# Allegro board BaseBoard.brd
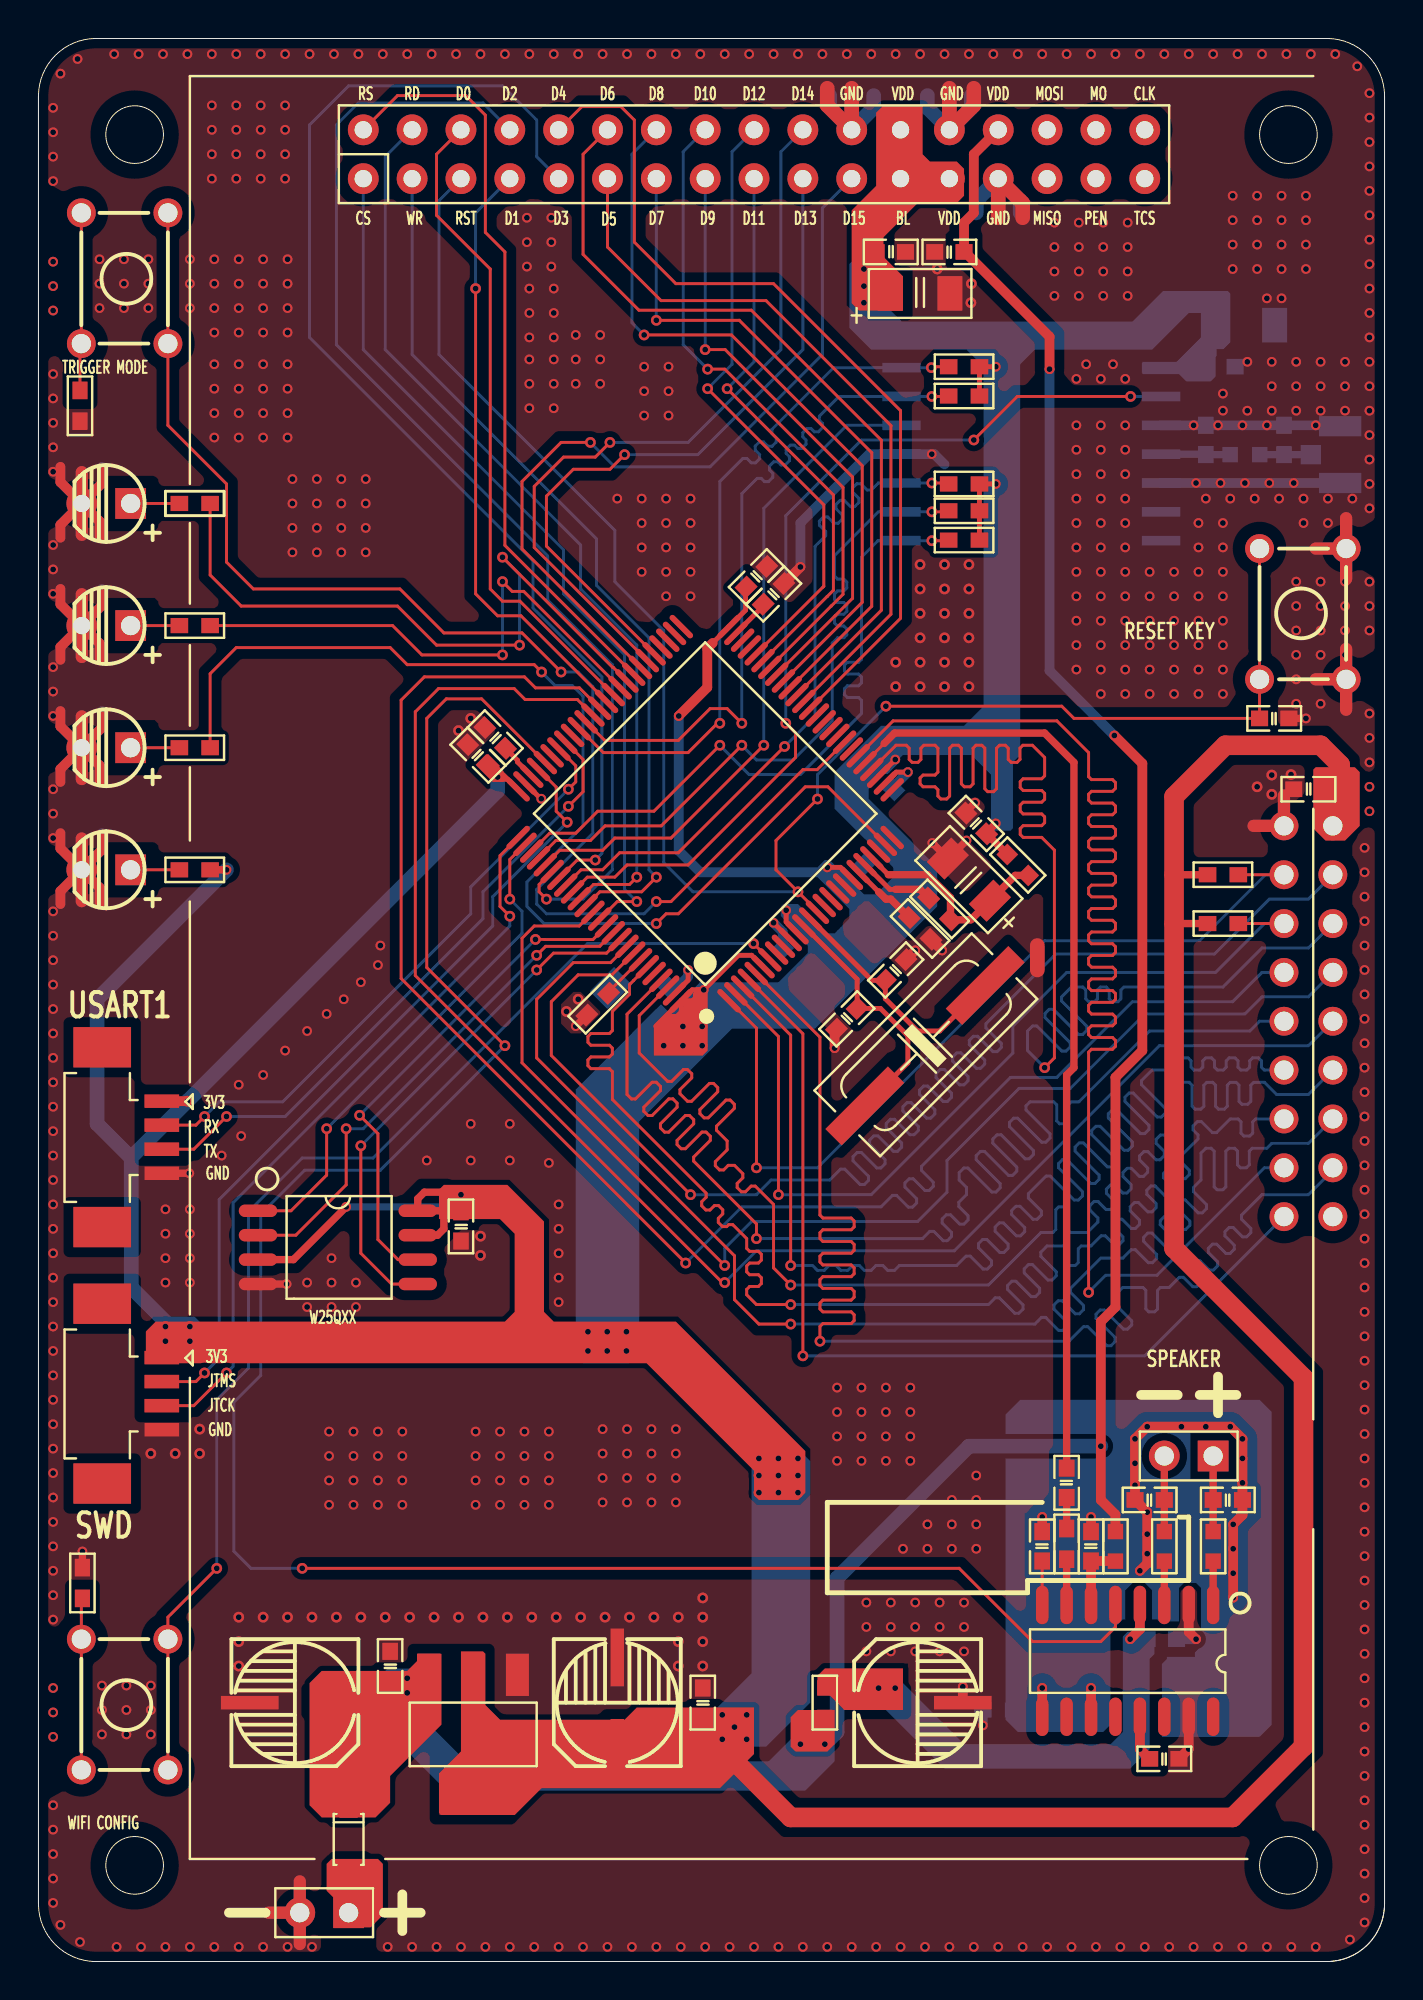
[diagram p0: board, top side]
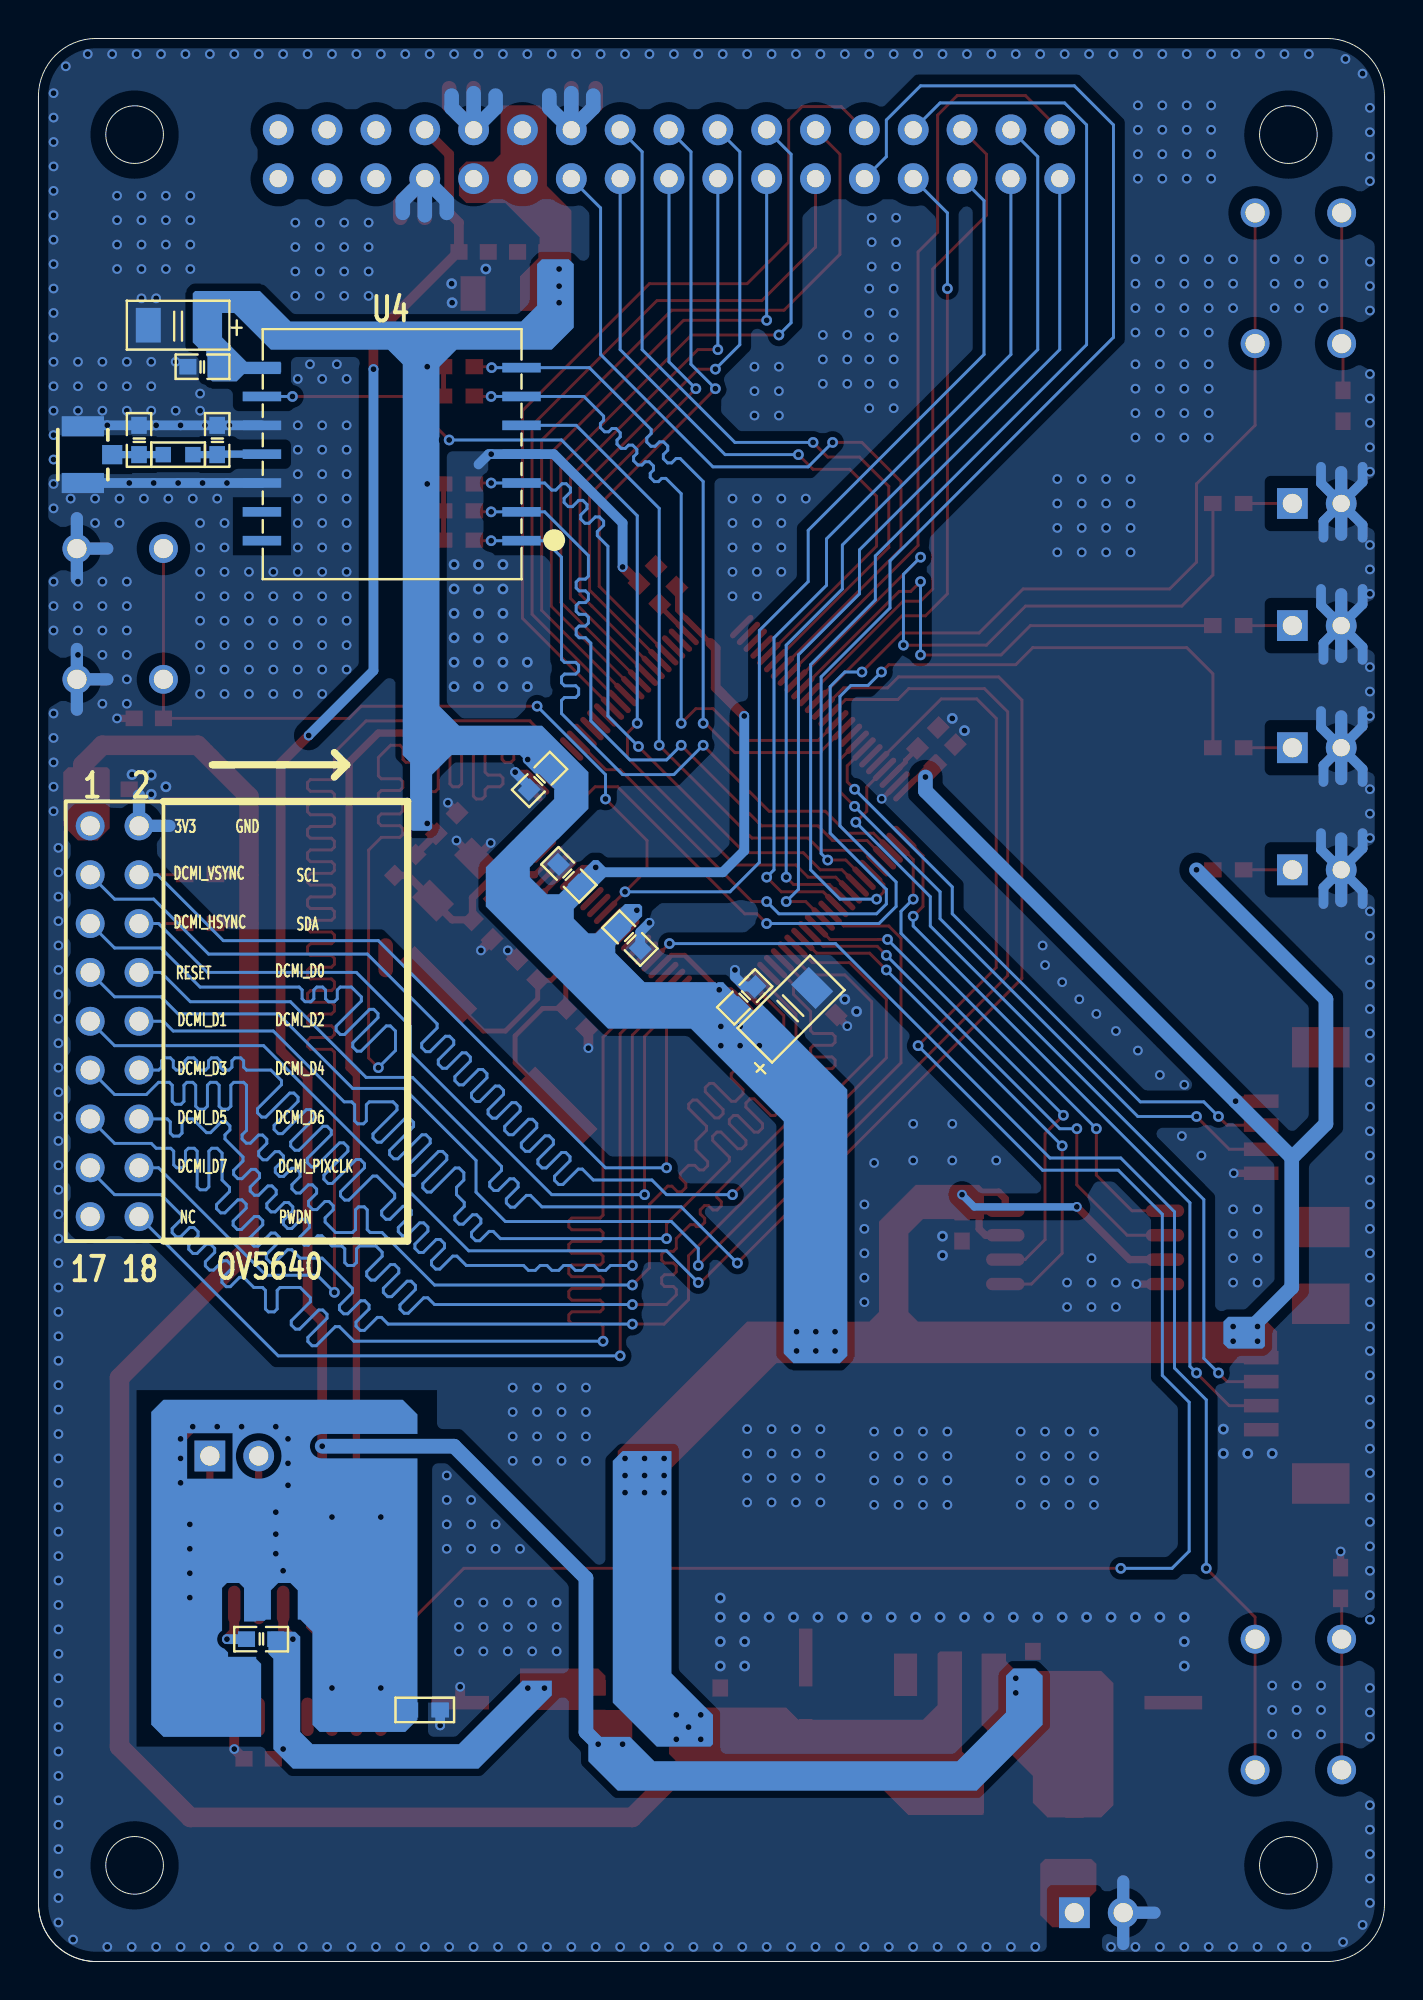
[diagram p1: board, bottom side, seen from below]

Outline 70 x 100 mm; copper layers: TOP, BOTTOM. Coordinates in mm from the lower left corner of the outline.
Outline path: circle c5,95 r1.5 ; circle c5,5 r1.5 ; circle c65,95 r1.5 ; circle c65,5 r1.5 ; 0,97 0,3 ; 0,97 arc(0.88,99.12) 3,100 ; 0,97 0,3 ; 0,3 arc(0.88,0.88) 3,0 ; 3,100 67,100 ; 3,100 67,100 ; 67,100 arc(69.12,99.12) 70,97 ; 3,0 67,0 ; 3,0 67,0 ; 67,0 arc(69.12,0.88) 70,3 ; 67,0 arc(69.12,0.88) 70,3 ; 70,97 70,3 ; 70,97 70,3

## Design rules (mm)
net group PWR: nets AGND AVDD PVDD VCC_3V3 VCC_5V

## Placement (name value [footprint] x y rotation side)
C1  0.1uF/C0603  [C0603]  64.26 64.64 0 top
C2  22pF/C0603  [C0603]  42.04 49.02 225 top
C3  22pF/C0603  [C0603]  44.58 51.56 45 top
C4  2.2uF  [C0603]  38.23 71.12 45 top
C5  2.2uF  [C0603]  23.75 63.63 135 top
C6  0.1uF/C0603  [C0603]  33.27 50.16 315 bottom
C7  0.1uF/C0603  [C0603]  39.24 53.21 45 bottom
C8  0.1uF/C0603  [C0603]  42.42 56.52 225 bottom
C9  0.1uF/C0603  [C0603]  43.94 61.47 135 bottom
C10  0.1uF/C0603  [C0603]  22.86 62.74 315 top
C11  10uF  [TA3216]  30.86 49.53 135 bottom
C12  0.1uF/C0603  [C0603]  48.77 59.18 315 top
C13  10uF  [TA3216]  48.39 56.26 135 top
C14  1uF/C0603  [C0603]  58.55 10.54 0 top
C15  470uF  [C_SMD_6R3X5R3]  45.72 13.46 0 top
C16  1uF/C0603  [C0603]  58.42 16.76 0 bottom
C17  1uF/C0603  [C0603]  54.74 21.59 270 top
C18  1uF/C0603  [C0603]  53.47 24.89 270 top
C19  0.1uF/C0603  [C0603]  52.2 21.59 270 top
C20  1uF/C0603  [C0603]  61.85 24 0 top
C21  1uF/C0603  [C0603]  57.78 24 0 top
C22  0.1uF/C0603  [C0603]  21.97 38.23 90 top
C23  0.1uF/C0603  [C0603]  66.04 60.96 180 top
C24  NC  [C0603]  60.71 79.12 90 bottom
C25  NC  [C0603]  64.77 79.12 90 bottom
C26  0.1uF/C0603  [C0603]  61.47 82.93 180 bottom
C27  10uF  [TA3216]  62.74 85.09 0 bottom
C28  10uF  [TA3216]  45.85 86.74 0 top
C29  0.1uF/C0603  [C0603]  44.32 88.9 180 top
C30  0.1uF/C0603  [C0603]  47.37 88.9 0 top
C31  220uF  [C_SMD_6R3X5R3]  13.34 13.46 180 top
C32  0.1uF  [C0603]  18.29 15.37 90 top
C33  220uF  [C_SMD_6R3X5R3]  30.1 13.46 90 top
C34  0.1uF  [C0603]  34.54 13.46 90 top
C35  0.1uF/C0603  [C0603]  37.34 72.01 225 top
D1  LED  [LED-3MM]  3.52 75.82 180 top
D2  LED  [LED-3MM]  3.52 69.47 180 top
D3  LED  [LED-3MM]  3.52 63.12 180 top
D4  LED  [LED-3MM]  3.52 56.77 180 top
D5  1N5819  [SOD123]  16.13 6.35 90 top
J1  JLINK  [1_25_PWT_4P]  3.68 29.46 270 top
J2  UART1  [1_25_PWT_4P]  3.68 42.8 270 top
J3  OV2640  [CON_2R54_2X9]  67.31 59.05 270 bottom
J4  CON2  [SIP-2]  16.13 2.54 180 top
J5  ANT  [IPX-3X3]  67.69 78.36 180 bottom
L1  10pF  [L0603]  62.74 78.36 0 bottom
LB1  600R  [L0603]  50.93 57.02 315 top
LB2  600R  [L0603]  56.01 21.59 90 top
LB3  600R  [L0603]  40.89 13.46 270 top
LB4  600R  [L0603]  61.09 21.59 270 top
LB5  600R  [L0603]  58.55 21.59 270 top
LCD1  TFT_LCD_3R5  [3_2_LCD]  37.97 93.98 0 top
LS1  SPEAKER/8Ohm/0.5W  [SIP-2]  61.09 26.29 180 top
R1  10k  [R0603]  29.08 49.78 225 top
R2  0R  [R0603]  46.86 54.74 135 top
R3  0R  [R0603]  45.85 53.72 135 top
R4  1k  [R0603]  8.13 75.82 0 top
R5  1k  [R0603]  8.13 69.47 0 top
R6  1k  [R0603]  8.13 63.12 0 top
R7  1k  [R0603]  8.13 56.77 0 top
R8  10k  [R0603]  2.16 80.9 90 top
R9  10k  [R0603]  2.29 19.68 270 top
R10  10k  [R0603]  53.47 21.72 90 top
R11  0R  [R0603]  49.91 13.08 0 bottom
R12  10k  [R0603]  61.59 56.52 0 top
R13  10k  [R0603]  61.59 53.98 0 top
R14  10k  [R0603]  48.13 81.41 180 top
R15  10k  [R0603]  48.13 82.93 180 top
R16  10k  [R0603]  48.13 73.91 180 top
R17  10k  [R0603]  48.13 75.44 180 top
R18  10k  [R0603]  48.13 76.83 180 top
SW1  RESET  [BUTTON_4P_DIP]  63.5 66.67 90 top
SW2  Trigger_Mode  [BUTTON_4P_DIP]  6.73 90.93 270 top
SW3  WIFI_Cfg  [BUTTON_4P_DIP]  6.73 16.76 270 top
U1  STM32F407VET6  [LQFP-100]  34.67 59.69 45 top
U2  PAM8403  [SOIC-16]  61.09 18.54 270 top
U3  W25Q64  [SOP-8-208]  15.57 37.13 0 top
U4  W8782  [W8782_MODULE]  51.69 78.36 270 bottom
U5  AMS1117-3V3  [SOT-223]  22.61 11.81 180 top
X1  8MHz  [CRY_HC_49U_SMD]  46.1 47.62 45 top

## Library data of the parts
C1-C10 C12 C14 C16-C26 C29 C30 C32 C34 C35 = CAP NP
C11 C13 C27 C28 = CAP TAC
C15 C31 C33 = CAP POL
D1-D4 = LED
D5 = Diode
J1 J2 = CON4
J3 = CON18A
J4 = CON2
J5 = CON3
L1 = INDUCTANCE
LB1-LB5 = FB
LCD1 = TFT_LCD_3R5
LS1 = SPEAKER
R1-R18 = RES
SW1-SW3 = SW DPST
U1 = STM32F407VET6
U2 = PAM8403
U3 = W25Q64
U4 = W8782
U5 = AMS1117-3V3
X1 = XTAL

## Footprints (pads in the part's own frame, mm; a bottom-side part is the same pattern mirrored in y, then rotated)
1_25_PWT_4P
  rect 2.101x3 smd: (-4.742,-0.368) (4.608,-0.368)
  rect 0.701x1.801 smd: 1(-1.941,2.731) 2(-0.693,2.731) 3(0.559,2.731) 4(1.808,2.731)
3_2_LCD
  round 1.6 hole 0.899: 1(-21.082,-1.27) 2(-21.082,1.27) 3(-18.542,-1.27) 4(-18.542,1.27) 5(-16.002,-1.27) 6(-16.002,1.27) 7(-13.462,-1.27) 8(-13.462,1.27) 9(-10.922,-1.27) 10(-10.922,1.27) 11(-8.382,-1.27) 12(-8.382,1.27) 13(-5.842,-1.27) 14(-5.842,1.27) 15(-3.302,-1.27) 16(-3.302,1.27) 17(-0.762,-1.27) 18(-0.762,1.27) 19(1.778,-1.27) 20(1.778,1.27) 21(4.318,-1.27) 22(4.318,1.27) 23(6.858,-1.27) 24(6.858,1.27) 25(9.398,-1.27) 26(9.398,1.27) 27(11.938,-1.27) 28(11.938,1.27) 29(14.478,-1.27) 30(14.478,1.27) 31(17.018,-1.27) 32(17.018,1.27) 33(19.558,-1.27) 34(19.558,1.27)
BUTTON_4P_DIP
  round 1.501 hole 1.001: 1(0,0) 2(6.8,0) 3(6.8,-4.501) 4(0,-4.501)
C0603
  rect 0.889x0.813 smd: 1(-0.762,0) 2(0.762,0)
C_SMD_6R3X5R3
  rect 3x0.701 smd: 1(-2.349,0) 2(2.349,0)
CON_2R54_2X9
  round 1.501 hole 1.001: 1(0,0) 2(0,2.54) 3(2.54,0) 4(2.54,2.54) 5(5.08,0) 6(5.08,2.54) 7(7.62,0) 8(7.62,2.54) 9(10.16,0) 10(10.16,2.54) 11(12.7,0) 12(12.7,2.54) 13(15.24,0) 14(15.24,2.54) 15(17.78,0) 16(17.78,2.54) 17(20.32,0) 18(20.32,2.54)
CRY_HC_49U_SMD
  rect 4.6x1.199 smd: 1(-4.427,0) 2(4.427,0)
IPX-3X3
  rect 2.2x1.049 smd: 1(0,1.476) 2(0,-1.476)
  rect 1.049x1.001 smd: 3(1.524,0)
L0603
  rect 0.8x0.8 smd: 1(-0.77,0) 2(0.77,0)
LED-3MM
  rect 1.6x1.6 hole 1.001: 1(-1.27,0)
  round 1.6 hole 0.899: 2(1.27,0)
LQFP-100
  oval 0.3x1.6 smd: 1(-5.999,-7.755) 2(-5.499,-7.755) 3(-5.001,-7.755) 4(-4.501,-7.755) 5(-4,-7.755) 6(-3.5,-7.755) 7(-3,-7.755) 8(-2.499,-7.755) 9(-1.999,-7.755) 10(-1.501,-7.755) 11(-1.001,-7.755) 12(-0.5,-7.755) 13(0,-7.755) 14(0.5,-7.755) 15(1.001,-7.755) 16(1.501,-7.755) 17(1.999,-7.755) 18(2.499,-7.755) 19(3,-7.755) 20(3.5,-7.755) 21(4,-7.755) 22(4.501,-7.755) 23(5.001,-7.755) 24(5.499,-7.755) 25(5.999,-7.755) 51(5.999,7.755) 52(5.499,7.755) 53(5.001,7.755) 54(4.501,7.755) 55(4,7.755) 56(3.5,7.755) 57(3,7.755) 58(2.499,7.755) 59(1.999,7.755) 60(1.501,7.755) 61(1.001,7.755) 62(0.5,7.755) 63(0,7.755) 64(-0.5,7.755) 65(-1.001,7.755) 66(-1.501,7.755) 67(-1.999,7.755) 68(-2.499,7.755) 69(-3,7.755) 70(-3.5,7.755) 71(-4,7.755) 72(-4.501,7.755) 73(-5.001,7.755) 74(-5.499,7.755) 75(-5.999,7.755)
  oval 1.6x0.3 smd: 26(7.755,-5.999) 27(7.755,-5.499) 28(7.755,-5.001) 29(7.755,-4.501) 30(7.755,-4) 31(7.755,-3.5) 32(7.755,-3) 33(7.755,-2.499) 34(7.755,-1.999) 35(7.755,-1.501) 36(7.755,-1.001) 37(7.755,-0.5) 38(7.755,0) 39(7.755,0.5) 40(7.755,1.001) 41(7.755,1.501) 42(7.755,1.999) 43(7.755,2.499) 44(7.755,3) 45(7.755,3.5) 46(7.755,4) 47(7.755,4.501) 48(7.755,5.001) 49(7.755,5.499) 50(7.755,5.999) 76(-7.755,5.999) 77(-7.755,5.499) 78(-7.755,5.001) 79(-7.755,4.501) 80(-7.755,4) 81(-7.755,3.5) 82(-7.755,3) 83(-7.755,2.499) 84(-7.755,1.999) 85(-7.755,1.501) 86(-7.755,1.001) 87(-7.755,0.5) 88(-7.755,0) 89(-7.755,-0.5) 90(-7.755,-1.001) 91(-7.755,-1.501) 92(-7.755,-1.999) 93(-7.755,-2.499) 94(-7.755,-3) 95(-7.755,-3.5) 96(-7.755,-4) 97(-7.755,-4.501) 98(-7.755,-5.001) 99(-7.755,-5.499) 100(-7.755,-5.999)
R0603
  rect 0.914x0.787 smd: 1(-0.8,0) 2(0.8,0)
SIP-2
  rect 1.6x1.6 hole 1.001: 1(0,0)
  round 1.6 hole 1.001: 2(2.54,0)
SOD123
  rect 0.899x0.95 smd: 1(-1.575,0) 2(1.575,0)
SOIC-16
  oval 1.999x0.65 smd: 1(0,0) 2(0,-1.27) 3(0,-2.54) 4(0,-3.81) 5(0,-5.08) 6(0,-6.35) 7(0,-7.62) 8(0,-8.89) 9(5.814,-8.89) 10(5.814,-7.62) 11(5.814,-6.35) 12(5.814,-5.08) 13(5.814,-3.81) 14(5.814,-2.54) 15(5.814,-1.27) 16(5.814,0)
SOP-8-208
  oval 1.999x0.65 smd: 1(-4.153,1.905) 2(-4.153,0.635) 3(-4.153,-0.635) 4(-4.153,-1.905) 5(4.153,-1.905) 6(4.153,-0.635) 7(4.153,0.635) 8(4.153,1.905)
SOT-223
  rect 1.199x2.2 smd: 1(-2.301,-3.099) 2(0,-3.099) 3(2.301,-3.099)
  rect 3.5x2.149 smd: 4(0,3.099)
TA3216
  rect 1.3x1.801 smd: 1(-1.549,0) 2(1.549,0)
W8782_MODULE
  rect 0.5x1.999 smd: 1(4.475,6.81) 2(2.974,6.81) 3(1.476,6.81) 4(-0.025,6.81) 5(-1.524,6.81) 6(-3.025,6.81) 7(-4.524,6.81) 8(-4.524,-6.69) 9(-3.025,-6.69) 10(-1.524,-6.69) 11(-0.025,-6.69) 12(1.476,-6.69) 13(2.974,-6.69) 14(4.475,-6.69)

## Nets
AGND: C17.1 C19.1 C20.2 C21.1 R11.2 U2.9(NC) U2.11(GND)
AVDD: C17.2 LB2.1 U2.6(VDD)
GND: C1.2 C2.2 C3.2 C4.2 C5.2 C6.1 C7.1 C8.1 C9.1 C10.1 C11.2 C12.1 C13.2 C14.2 C15.2 C16.2 C22.1 C23.2 C24.2 C25.2 C26.1 C27.2 C28.2 C29.1 C30.1 C31.2 C32.2 C33.2 C34.2 C35.1 D1.2(K) D2.2(K) D3.2(K) D4.2(K) J1.4 J2.4 J3.2 J4.2 J5.1 J5.2 LCD1.22(GND#22) LCD1.26(GND#26) LCD1.27(GND#27) R1.2 R3.1 R8.1 R9.1 R11.1 SW1.3(NO1) SW1.4(NO2) U1.10(VSS#10) U1.27(VSS#27) U1.74(VSS#74) U1.99(VSS#99) U2.2(PGND#2) U2.15(PGND#15) U3.4(GND) U4.4(GND#4) U4.10(GND#10) U4.12(GND#12) U5.1(GND)
PVDD: C14.1 C15.1 C16.1 LB3.1 U2.4(PVDD#4) U2.13(PVDD#13)
VCC_3V3: C6.2 C7.2 C8.2 C9.2 C10.2 C11.1 C12.2 C22.2 C23.1 C26.2 C27.1 C28.1 C29.2 C33.1 C34.1 C35.2 J1.1 J2.1 J3.1 LB1.1 LCD1.23(BL) LCD1.24(VDD_3V3#24) LCD1.25(VDD_3V3#25) R7.2 R12.1 R13.1 R14.1 R15.1 R16.1 R17.1 R18.1 U1.6(VBAT) U1.11(VDD#11) U1.19(VDD#19) U1.28(VDD#28) U1.50(VDD#50) U1.75(VDD#75) U1.100(VDD#100) U3.3(WP#) U3.7(HOLD) U3.8(VCC) U4.8(3V3) U5.2(OUT0) U5.4(OUT1)
VCC_5V: C30.2 C31.1 C32.1 D5.2 LB2.2 LB3.2 LCD1.28(BL_VDD) U5.3(IN)
BOOT0: R1.1 U1.94(BOOT0/VPP)
DAC2: C18.1 U1.30(PA5/SPI1_SCK/OTG_HS_ULPI_CK/TIM)
DCMI_D0: J3.8 U1.63(PC6/I2S2_MCK/TIM8_CH1/SDIO_D6/U)
DCMI_D1: J3.9 U1.64(PC7/I2S3_MCK/TIM8_CH2/SDIO_D7/U)
DCMI_D2: J3.10 U1.97(PE0/TIM4_ETR/FSMC_NBL0/DCMI_D2/)
DCMI_D3: J3.11 U1.98(PE1/FSMC_NBL1/DCMI_D3/EVENTOUT)
DCMI_D4: J3.12 U1.3(PE4/TRACED1/FSMC_A20/DCMI_D4/EV)
DCMI_D5: J3.13 U1.92(PB6/I2C1_SCL/TIM4_CH1/CAN2_TX/D)
DCMI_D6: J3.14 U1.95(PB8/TIM4_CH3/SDIO_D4/TIM10_CH1/)
DCMI_D7: J3.15 U1.5(PE6/TRACED3/FSMC_A22/TIM9_CH2/D)
DCMI_HSYNC: J3.5 U1.29(PA4/SPI1_NSS/SPI3_NSS/USART2_CK)
DCMI_PIXCLK: J3.16 U1.31(PA6/SPI1_MISO/TIM8_BKIN/TIM13_C)
DCMI_VSYNC: J3.3 U1.93(PB7/I2C1_SDA/FSMC_NL/DCMI_VSYNC)
FLASH_CS: U1.77(PA15(JTDI)/JTDI/SPI3_NSS/I2S3_W) U3.1(CS)
FSMC_D0: LCD1.6(DB1) U1.61(PD14/FSMC_D0/TIM4_CH3/EVENTOUT/)
FSMC_D1: LCD1.7(DB2) U1.62(PD15/FSMC_D1/TIM4_CH4/EVENTOUT)
FSMC_D2: LCD1.8(DB3) U1.81(PD0/FSMC_D2/CAN1_RX/EVENTOUT)
FSMC_D3: LCD1.9(DB4) U1.82(PD1/FSMC_D3/CAN1_TX/EVENTOUT)
FSMC_D4: LCD1.10(DB5) U1.38(PE7/FSMC_D4/TIM1_ETR/EVENTOUT)
FSMC_D5: LCD1.11(DB6) U1.39(PE8/FSMC_D5/TIM1_CH1N/EVENTOUT)
FSMC_D6: LCD1.12(DB7) U1.40(PE9/FSMC_D6/TIM1_CH1/EVENTOUT)
FSMC_D7: LCD1.13(DB8) U1.41(PE10/FSMC_D7/TIM1_CH2N/EVENTOUT)
FSMC_D8: LCD1.14(DB10) U1.42(PE11/FSMC_D8/TIM1_CH2/EVENTOUT)
FSMC_D9: LCD1.15(DB11) U1.43(PE12/FSMC_D9/TIM1_CH3N/EVENTOUT)
FSMC_D10: LCD1.16(DB12) U1.44(PE13/FSMC_D10/TIM1_CH3/EVENTOUT)
FSMC_D11: LCD1.17(DB13) U1.45(PE14/FSMC_D11/TIM1_CH4/EVENTOUT)
FSMC_D12: LCD1.18(DB14) U1.46(PE15/FSMC_D12/TIM1_BKIN/EVENTOU)
FSMC_D13: LCD1.19(DB15) U1.55(PD8/FSMC_D13/USART3_TX/EVENTOUT)
FSMC_D14: LCD1.20(DB16) U1.56(PD9/FSMC_D14/USART3_RX/EVENTOUT)
FSMC_D15: LCD1.21(DB17) U1.57(PD10/FSMC_D15/USART3_CK/EVENTOU)
JTCK: J1.3 U1.76(PA14(JTCK-SWCLK)/JTCK-SWCLK/EVE)
JTMS: J1.2 U1.72(PA13(JTMS-SWDIO)/JTMS-SWDIO/EVE)
KEY1: SW2.1(COMMON1) SW2.2(COMMON2) U1.33(PC4/ETH_RMII_RX_D0/ETH_MII_RX_D)
KEY3: SW3.1(COMMON1) SW3.2(COMMON2) U1.7(PC13/EVENTOUT/RTC_AF1)
LCD_CS: LCD1.1(LCD_CS) U1.88(PD7/USART2_CK/FSMC_NE1/FSMC_NCE)
LCD_RD: LCD1.4(RD) U1.85(PD4/FSMC_NOE/USART2_RTS/EVENTOU)
LCD_RS: LCD1.2(RS) U1.58(PD11/FSMC_CLE/FSMC_A16/USART3_C)
LCD_WR: LCD1.3(WR/CLK) U1.86(PD5/FSMC_NWE/USART2_TX/EVENTOUT)
LED1: R4.2 U1.59(PD12/FSMC_ALE/FSMC_A17/TIM4_CH1)
LED2: R5.2 U1.60(PD13/FSMC_A18/TIM4_CH2/EVENTOUT)
LED3: R6.2 U1.24(PA1/USART2_RTS/UART4_RX/ETH_RMI)
MUTE: U1.71(PA12/USART1_RTS/CAN1_TX/TIM1_ET) U2.5(M\U\T\E\)
OSC_IN: C2.1 U1.12(PH0-OSC_IN(PH0)/EVENTOUT/OSC_IN) X1.1(X1)
OSC_OUT: C3.1 U1.13(PH1-OSC_OUT(PH1)/EVENTOUT/OSC_O) X1.2(X2)
OV_PWDN: J3.18 U1.4(PE5/TRACED2/FSMC_A21/TIM9_CH1/D)
OV_RESET: J3.7 U1.87(PD6/FSMC_NWAIT/USART2_RX/EVENTO)
OV_SCL: J3.4 R12.2 U1.1(PE2/TRACECLK/FSMC_A23/ETH_MII_T)
OV_SDA: J3.6 R13.2 U1.2(PE3/TRACED0/FSMC_A19/EVENTOUT)
RESET: C1.1 LCD1.5(RST) SW1.1(COMMON1) SW1.2(COMMON2) U1.14(NRST)
SDIO_CK: U1.80(PC12/UART5_TX/SDIO_CK/DCMI_D9/S) U4.5(SD_CLK)
SDIO_CMD: R18.2 U1.83(PD2/TIM3_ETR/UART5_RX/SDIO_CMD/) U4.3(SD_CMD)
SDIO_D0: R14.2 U1.65(PC8/TIM8_CH3/SDIO_D0/TIM3_CH3/U) U4.6(SD_D0)
SDIO_D1: R15.2 U1.66(PC9/I2S_CKIN/MCO2/TIM8_CH4/SDIO) U4.7(SD_D1)
SDIO_D2: R16.2 U1.78(PC10/SPI3_SCK/I2S3_CK/UART4_TX/) U4.1(SD_D2)
SDIO_D3: R17.2 U1.79(PC11/UART4_RX/SPI3_MISO/SDIO_D3) U4.2(SD_D3)
SPI1_MISO: U1.90(PB4(NJTRST)/NJTRST/SPI3_MISO/TI) U3.2(SO)
SPI1_MOSI: U1.91(PB5/I2C1_SMBA/CAN2_RX/OTG_HS_UL) U3.5(SI)
SPI1_SCK: U1.89(PB3(JTDO/TRACESWO)/JTDO/TRACESW) U3.6(CLK)
USART1_RX: J2.2 U1.69(PA10/USART1_RX/TIM1_CH3/OTG_FS_)
USART1_TX: J2.3 U1.68(PA9/USART1_TX/TIM1_CH2/I2C3_SMB)
VCAP1: C4.1 U1.49(VCAP_1)
VCAP2: C5.1 U1.73(VCAP_2)
WL_WAKE: U1.84(PD3/FSMC_CLK/USART2_CTS/EVENTOU) U4.9(PDN)
N03479: C13.1 LB1.2 R2.1 U1.22(VDDA)
N04015: R2.2 U1.21(VREF+)
N04111: R3.2 U1.20(VSSA)
N15480: D1.1(A) R4.1
N15556: D2.1(A) R5.1
N15634: D3.1(A) R6.1
N15960: D4.1(A) R7.1
N16253: R8.2 SW2.3(NO1) SW2.4(NO2)
N16267: R9.2 SW3.3(NO1) SW3.4(NO2)
N17141: R10.1 U2.7(INL)
N17187: C18.2 R10.2
N17231: C19.2 U2.8(VREF)
N18659: LB4.2 U2.1(+OUT_L)
N18666: LB5.2 U2.3(-OUT_L)
N18725: C20.1 LB4.1 LS1.1
N18732: C21.2 LB5.1 LS1.2
N25443: C24.1 L1.1 U4.11(ANT_RF)
N25776: C25.1 J5.3 L1.2
N32193: D5.1 J4.1

Pads without a net: J3 17; LCD1 29 30 31 32 33 34; U1 8 9 15 16 17 18 23 25 26 32 34 35 36 37 47 48 51 52 53 54 67 70 96; U2 10 12 14 16; U4 13 14

## Via types
v1: diameter 0.559, hole 0.305, TOP to BOTTOM, 178 vias
v2: diameter 0.508, hole 0.305, TOP to BOTTOM, 703 vias

## Routing (per net, layer and track width the routed paths; a pad name or vN(x,y) marks a point on that pad's centre or on a via; arc(x,y) is an arc through that point)
AGND: length 26.4
  TOP w0.508: U2.11 v2(54.74,14.22) ; v2(62.13,18.92) v2(62.13,20.19) v2(62.13,21.46) v2(62.13,22.73) 62.61,23.22 C20.2 v2(62.61,24.89) v2(62.61,26.16) v2(62.61,27.18) v2(61.98,27.81) v2(60.71,27.81) v2(59.44,27.81) v2(57.66,27.81) v2(57.02,27.18) v2(57.02,25.91) v2(57.02,24.77) 57.02,24 v2(57.66,23.37) v2(57.66,22.23) v2(57.66,21.21) 57.66,20.7 v2(57.28,20.32) ; U2.9 v2(52.2,14.22) ; C19.1 v2(52.2,23.11) ; C17.1 v2(54.74,23.11)
AVDD: length 3.6
  TOP w0.508: LB2.1 56,20.83 C17.2 U2.6
GND: length 227.4
  TOP w0.254: v2(45.21,61.85) 44.61,61.85 44.04,61.29 ; 39.09,53.14 38.23,54.01 v2(38.23,54.01) ; v2(33.78,51.56) 33.78,51.02 U1.99 ; v2(26.15,60.46) 26.12,60.46 25.3,61.29
  TOP w0.381: v2(48.26,58.29) 47.32,57.36 C13.2 v2(46.48,58.17) ; R9.1 v2(2.29,21.32) ; 28.52,49.22 v2(27.94,48.64) ; v2(48.71,60.26) 48.23,59.78 C12.1 ; J2.4 v2(7.84,40.99) ; U3.4 v2(12.9,35.23) ; C1.2 v2(65.91,64.64)
  TOP w0.508: D1.2 1.14,76.93 1.14,77.72 ; D1.2 3.3,76.87 3.3,77.6 ; D1.2 1.14,74.71 1.14,74.04 ; D1.2 3.17,74.9 3.17,74.04 ; 3.17,61.34 3.17,62.2 D3.2 ; C4.2 v2(39.62,72.52) ; D2.2 1.14,70.58 1.14,71.37 ; D2.2 1.14,68.36 1.14,67.69 ; D2.2 3.3,70.52 3.3,71.25 ; D2.2 3.17,68.55 3.17,67.69 ; D3.2 1.14,64.23 1.14,65.02 ; D3.2 1.14,62.01 1.14,61.34 ; D3.2 3.3,64.17 3.3,64.9 ; C14.2 v2(59.82,11.05) U2.15 ; D4.2 1.14,55.66 1.14,54.99 ; D4.2 1.14,57.88 1.14,58.67 ; D4.2 3.17,55.85 3.17,54.99 ; D4.2 3.3,57.82 3.3,58.55 ; v2(60.2,16.76) 59.82,17.14 U2.2 ; C3.2 v2(45.59,52.58) ; C2.2 41.4,48.39 v2(41.4,47.5) ; C15.2 v2(48.07,14.29) ; 46.41,53.15 v2(46.99,52.58)
  TOP w0.635: 2.25,61.49 D3.2 2.25,64.75 ; 2.25,55.14 D4.2 2.25,58.4 ; 2.25,77.45 D1.2 2.25,74.19 ; 64.77,60.63 J3.2 63.19,59.05 ; 13.59,0.91 13.59,2.54 ; 13.59,2.54 13.59,4.17 ; 13.59,2.54 11.96,2.54 ; 66.42,66.67 SW1.4 ; SW1.4 68,65.1 ; SW1.4 68,68.25 ; SW1.3 68,75.05 ; SW1.3 66.42,73.47 ; SW1.3 68,71.89 ; 2.25,71.1 D2.2 2.25,67.84
  TOP w0.762: 49.91,90.68 LCD1.27 51.18,91.44 51.18,90.68 ; 42.29,97.41 LCD1.22 41.02,96.52 41.02,97.41 ; 47.37,97.41 47.37,95.25 48.64,96.52 48.64,97.41 ; 51.94,51.56 51.94,52.83
  BOTTOM w0.508: D3.2 1.14,64.23 1.14,65.02 ; D3.2 3.3,64.17 3.3,65.02 ; D3.2 1.14,62.01 1.14,61.34 ; D3.2 3.17,62.2 3.17,61.34 ; D4.2 3.17,55.85 3.17,54.99 ; D4.2 1.14,55.66 1.14,54.99 ; D4.2 3.3,57.82 3.3,58.67 ; D4.2 1.14,57.88 1.14,58.67 ; C7.1 38.7,53.54 v2(38.23,54.01) ; J5.1 67.64,79.88 v2(66.42,79.88) C25.2 v2(63.88,79.88) v2(62.61,79.88) v2(61.34,79.88) C24.2 v2(60.07,79.88) U4.10 ; 1.14,77.72 1.14,76.93 D1.2 ; D2.2 1.14,70.58 1.14,71.37 ; D2.2 3.17,68.55 3.17,67.69 ; D2.2 3.3,70.52 3.3,71.37 ; D2.2 1.14,68.36 1.14,67.69 ; D1.2 3.3,76.87 3.3,77.72 ; D1.2 1.14,74.71 1.14,74.04 ; D1.2 3.17,74.9 3.17,74.04 ; v2(39.62,72.52) 39.62,74.81 43.2,78.38 U4.4 v2(46.46,78.38) 46.58,78.38 47.12,77.85 ; J5.2 v2(65.28,76.88) v2(64.01,76.88) v2(62.74,76.88) v2(61.47,76.88) v2(60.2,76.88) U4.12 ; R11.1 v2(49.11,12.28) ; v2(33.78,51.56) 33.78,51.21 33.27,50.7 C6.1 ; C9.1 44.48,61.12 v2(45.21,61.85) ; v2(60.2,16.76) C16.2
  BOTTOM w0.635: 2.25,55.14 D4.2 2.25,58.4 ; 66.42,73.47 SW1.3 ; SW1.3 68,71.89 ; SW1.3 68,75.05 ; 2.25,77.45 D1.2 2.25,74.19 ; 68,65.1 SW1.4 ; SW1.4 68,68.25 ; SW1.4 66.42,66.67 ; 2.25,61.49 D3.2 2.25,64.75 ; 11.96,2.54 13.59,2.54 ; 13.59,2.54 13.59,0.91 ; 13.59,2.54 13.59,4.17 ; 2.25,67.84 D2.2 2.25,71.1 ; 63.19,59.05 J3.2 64.77,60.63
  BOTTOM w0.762: 47.37,95.25 47.37,97.16 ; 47.37,95.25 46.23,96.39 46.23,97.03 ; 47.37,95.25 48.51,96.39 48.51,97.03 ; 48.77,90.93 48.77,91.57 LCD1.27 ; 51.05,90.93 51.05,91.57 LCD1.27 ; LCD1.27 49.91,90.81 ; LCD1.22 43.43,96.39 43.43,97.03 ; LCD1.22 42.29,97.16 ; LCD1.22 41.15,96.39 41.15,97.03
  vias: v1(5.84,26.42) v1(7.11,26.42) v1(8.38,27.69) v1(8.38,26.42) v1(10.41,17.91) v1(10.41,16.64) v1(10.41,15.37) v1(11.68,17.91) v1(12.95,17.91) v1(14.22,17.91) v1(15.49,17.91) v1(16.76,17.91) v1(18.03,17.91) v1(19.3,17.91) v1(20.57,17.91) v1(21.84,64.01) v1(21.84,17.91) v1(22.48,64.64) v1(22.99,37.72) v1(22.99,36.72) v1(23.11,17.91) v1(24.38,17.91) v1(25.65,17.91) v1(26.92,17.91) v1(27.46,49.4) v1(28.07,50.04) v1(28.19,17.91) v1(29.46,17.91) v1(30.73,17.91) v1(32,17.91) v1(33.27,17.91) v1(33.27,16.64) v1(33.27,15.37) v1(34.54,18.91) v1(34.54,17.91) v1(34.54,16.64) v1(34.54,15.37) v1(44.58,67.56) v1(44.58,66.29) v1(45.85,72.64) v1(45.85,71.37) v1(45.85,70.1) v1(45.85,68.83) v1(45.85,67.56) v1(45.85,66.29) v1(46.74,88.01) v1(47.12,72.64) v1(47.12,71.37) v1(47.12,70.1) v1(47.12,68.83) v1(47.12,67.56) v1(47.12,66.29) v1(48.39,72.64) v1(48.39,71.37) v1(48.39,70.1) v1(48.39,68.83) v1(48.39,67.56) v1(48.39,66.29) v1(48.51,87.25) v1(48.49,86.26) v1(63.37,61.09) v1(64.14,61.7) v1(64.14,60.7) v1(65.14,61.72) v2(0.76,96.39) v2(0.76,95.12) v2(0.76,93.85) v2(0.76,92.58) v2(0.76,88.39) v2(0.76,87.12) v2(0.76,85.85) v2(0.76,82.55) v2(0.76,81.28) v2(0.76,80.01) v2(0.76,78.74) v2(0.76,77.47) v2(0.76,73.66) v2(0.76,72.39) v2(0.76,71.12) v2(0.76,67.31) v2(0.76,66.04) v2(0.76,64.77) v2(0.76,60.96) v2(0.76,59.69) v2(0.76,58.42) v2(0.76,54.61) v2(0.76,53.34) v2(0.76,52.07) v2(0.76,50.8) v2(0.76,49.53) v2(0.76,48.26) v2(0.76,46.99) v2(0.76,45.72) v2(0.76,44.45) v2(0.76,43.18) v2(0.76,41.91) v2(0.76,40.64) v2(0.76,39.37) v2(0.76,38.1) v2(0.76,36.83) v2(0.76,35.56) v2(0.76,34.29) v2(0.76,33.02) v2(0.76,31.75) v2(0.76,30.48) v2(0.76,29.21) v2(0.76,27.94) v2(0.76,26.67) v2(0.76,25.4) v2(0.76,24.13) v2(0.76,22.86) v2(0.76,21.59) v2(0.76,20.32) v2(0.76,19.05) v2(0.76,17.78) v2(0.76,14.22) v2(0.76,12.95) v2(0.76,11.68) v2(0.76,8.13) v2(0.76,6.86) v2(0.76,5.59) v2(0.76,4.32) v2(0.76,3.05) v2(1.14,98.17) v2(1.14,1.91) v2(2.03,98.93) v2(2.16,1.02) v2(3.17,88.52) v2(3.17,87.25) v2(3.17,85.98) v2(3.3,14.35) v2(3.3,13.08) v2(3.3,11.81) v2(3.94,99.19) v2(4.06,0.76) v2(4.45,88.52) v2(4.45,87.25) v2(4.45,85.98) v2(4.57,14.35) v2(4.57,13.08) v2(4.57,11.81) v2(5.21,99.19) v2(5.33,0.76) v2(5.71,88.52) v2(5.71,87.25) v2(5.71,85.98) v2(5.84,14.35) v2(5.84,13.08) v2(5.84,11.81) v2(6.48,99.19) v2(6.6,39.12) v2(6.6,37.85) v2(6.6,36.58) v2(6.6,35.31) v2(6.6,0.76) v2(7.75,99.19) v2(7.87,88.52) v2(7.87,87.25) v2(7.87,85.98) v2(7.87,39.12) v2(7.87,37.85) v2(7.87,36.58) v2(7.87,35.31) v2(7.87,0.76) v2(9.02,99.19) v2(9.02,96.52) v2(9.02,95.25) v2(9.02,93.98) v2(9.02,92.71) v2(9.14,88.52) v2(9.14,87.25) v2(9.14,85.98) v2(9.14,84.71) v2(9.14,83.06) v2(9.14,81.79) v2(9.14,80.52) v2(9.14,79.25) v2(9.14,0.76) v2(9.53,41.91) v2(10.29,99.19) v2(10.29,96.52) v2(10.29,95.25) v2(10.29,93.98) v2(10.29,92.71) v2(10.41,88.52) v2(10.41,87.25) v2(10.41,85.98) v2(10.41,84.71) v2(10.41,83.06) v2(10.41,81.79) v2(10.41,80.52) v2(10.41,79.25) v2(10.41,45.59) v2(10.41,0.76) v2(10.54,42.93) v2(11.56,99.19) v2(11.56,96.52) v2(11.56,95.25) v2(11.56,93.98) v2(11.56,92.71) v2(11.68,88.52) v2(11.68,87.25) v2(11.68,85.98) v2(11.68,84.71) v2(11.68,83.06) v2(11.68,81.79) v2(11.68,80.52) v2(11.68,79.25) v2(11.68,46.1) v2(11.68,0.76) v2(12.83,99.19) v2(12.83,96.52) v2(12.83,95.25) v2(12.83,93.98) v2(12.83,92.71) v2(12.83,47.37) v2(12.95,88.52) v2(12.95,87.25) v2(12.95,85.98) v2(12.95,84.71) v2(12.95,83.06) v2(12.95,81.79) v2(12.95,80.52) v2(12.95,79.25) v2(12.95,0.76) v2(13.21,77.09) v2(13.21,75.82) v2(13.21,74.55) v2(13.21,73.28) v2(13.97,48.39) v2(13.97,35.31) v2(13.97,34.04) v2(14.1,99.19) v2(14.22,0.76) v2(14.48,77.09) v2(14.48,75.82) v2(14.48,74.55) v2(14.48,73.28) v2(14.99,49.28) v2(15.11,27.56) v2(15.11,26.29) v2(15.11,25.02) v2(15.11,23.75) v2(15.24,36.58) v2(15.24,35.31) v2(15.24,34.04) v2(15.37,99.19) v2(15.75,77.09) v2(15.75,75.82) v2(15.75,74.55) v2(15.75,73.28) v2(15.88,50.04) v2(16.38,27.56) v2(16.38,26.29) v2(16.38,25.02) v2(16.38,23.75) v2(16.51,35.31) v2(16.51,34.04) v2(16.64,99.19) v2(16.76,50.93) v2(17.02,77.09) v2(17.02,75.82) v2(17.02,74.55) v2(17.02,73.28) v2(17.65,51.82) v2(17.65,27.56) v2(17.65,26.29) v2(17.65,25.02) v2(17.65,23.75) v2(17.78,52.83) v2(17.91,99.19) v2(18.16,0.76) v2(18.92,27.56) v2(18.92,26.29) v2(18.92,25.02) v2(18.92,23.75) v2(19.18,99.19) v2(19.43,0.76) v2(20.19,41.66) v2(20.45,99.19) v2(20.7,0.76) v2(21.72,99.19) v2(21.97,0.76) v2(22.48,43.56) v2(22.48,41.66) v2(22.73,27.56) v2(22.73,26.29) v2(22.73,25.02) v2(22.73,23.75) v2(22.99,99.19) v2(23.24,0.76) v2(24,27.56) v2(24,26.29) v2(24,25.02) v2(24,23.75) v2(24.26,99.19) v2(24.51,43.56) v2(24.51,41.66) v2(24.51,0.76) v2(25.27,27.56) v2(25.27,26.29) v2(25.27,25.02) v2(25.27,23.75) v2(25.4,90.68) v2(25.4,89.41) v2(25.4,88.14) v2(25.53,99.19) v2(25.53,87) v2(25.53,85.72) v2(25.53,84.45) v2(25.53,83.31) v2(25.53,82.04) v2(25.53,80.77) v2(25.78,0.76) v2(26.54,41.53) v2(26.54,27.56) v2(26.54,26.29) v2(26.54,25.02) v2(26.54,23.75) v2(26.67,90.68) v2(26.67,89.41) v2(26.67,88.14) v2(26.8,99.19) v2(26.8,87) v2(26.8,85.72) v2(26.8,84.45) v2(26.8,83.31) v2(26.8,82.04) v2(26.8,80.77) v2(27.05,39.37) v2(27.05,38.1) v2(27.05,36.83) v2(27.05,35.56) v2(27.05,34.29) v2(27.05,0.76) v2(27.94,84.58) v2(27.94,83.31) v2(27.94,82.04) v2(28.07,99.19) v2(28.32,0.76) v2(29.21,84.58) v2(29.21,83.31) v2(29.21,82.04) v2(29.34,99.19) v2(29.34,27.69) v2(29.34,26.42) v2(29.34,25.15) v2(29.34,23.88) v2(29.59,0.76) v2(30.1,76.07) v2(30.61,99.19) v2(30.61,27.69) v2(30.61,26.42) v2(30.61,25.15) v2(30.61,23.88) v2(30.86,0.76) v2(31.37,76.07) v2(31.37,74.8) v2(31.37,73.53) v2(31.37,72.26) v2(31.5,82.93) v2(31.5,81.66) v2(31.5,80.39) v2(31.88,99.19) v2(31.88,27.69) v2(31.88,26.42) v2(31.88,25.15) v2(31.88,23.88) v2(32.13,0.76) v2(32.64,76.07) v2(32.64,74.8) v2(32.64,73.53) v2(32.64,72.26) v2(32.64,70.99) v2(32.77,82.93) v2(32.77,81.66) v2(32.77,80.39) v2(33.15,99.19) v2(33.15,27.69) v2(33.15,26.42) v2(33.15,25.15) v2(33.15,23.88) v2(33.4,0.76) v2(33.91,76.07) v2(33.91,74.8) v2(33.91,73.53) v2(33.91,72.26) v2(33.91,70.99) v2(34.42,99.19) v2(34.67,0.76) v2(35.69,99.19) v2(35.94,0.76) v2(36.96,99.19) v2(37.21,0.76) v2(38.23,99.19) v2(38.48,0.76) v2(39.5,99.19) v2(39.75,0.76) v2(40.77,99.19) v2(41.02,0.76) v2(41.53,29.84) v2(41.53,28.57) v2(41.53,27.3) v2(41.53,26.04) v2(42.04,99.19) v2(42.29,0.76) v2(42.8,29.84) v2(42.8,28.57) v2(42.8,27.3) v2(42.8,26.04) v2(43.05,18.67) v2(43.05,17.4) v2(43.05,16.13) v2(43.31,99.19) v2(43.56,0.76) v2(44.07,29.84) v2(44.07,28.57) v2(44.07,27.3) v2(44.07,26.04) v2(44.32,18.67) v2(44.32,17.4) v2(44.32,16.13) v2(44.58,99.19) v2(44.83,0.76) v2(44.96,21.46) v2(45.34,29.84) v2(45.34,28.57) v2(45.34,27.3) v2(45.34,26.04) v2(45.59,18.67) v2(45.59,17.4) v2(45.59,16.13) v2(45.85,99.19) v2(46.1,0.76) v2(46.23,22.73) v2(46.23,21.46) v2(46.86,18.67) v2(46.86,17.4) v2(46.86,16.13) v2(47.12,99.19) v2(47.37,0.76) v2(47.5,24) v2(47.5,22.73) v2(47.5,21.46) v2(48.13,18.67) v2(48.13,17.4) v2(48.13,16.13) v2(48.39,99.19) v2(48.64,0.76) v2(48.77,25.27) v2(48.77,24) v2(48.77,22.73) v2(48.77,21.46) v2(49.66,99.19) v2(49.91,0.76) v2(50.93,99.19) v2(51.18,0.76) v2(52.2,99.19) v2(52.45,0.76) v2(52.83,90.42) v2(52.83,89.15) v2(52.83,87.88) v2(52.83,86.61) v2(53.47,99.19) v2(53.72,0.76) v2(53.98,82.3) v2(53.98,79.88) v2(53.98,78.61) v2(53.98,77.34) v2(53.98,76.07) v2(53.98,74.8) v2(53.98,73.53) v2(53.98,72.26) v2(53.98,70.99) v2(53.98,69.72) v2(53.98,68.45) v2(53.98,67.18) v2(54.1,90.42) v2(54.1,89.15) v2(54.1,87.88) v2(54.1,86.61) v2(54.48,83.06) v2(54.74,99.19) v2(54.99,0.76) v2(55.24,82.3) v2(55.24,79.88) v2(55.24,78.61) v2(55.24,77.34) v2(55.24,76.07) v2(55.24,74.8) v2(55.24,73.53) v2(55.24,72.26) v2(55.24,70.99) v2(55.24,69.72) v2(55.24,68.45) v2(55.24,67.18) v2(55.24,65.91) v2(55.37,90.42) v2(55.37,89.15) v2(55.37,87.88) v2(55.37,86.61) v2(55.88,83.06) v2(56.01,99.19) v2(56.26,0.76) v2(56.52,82.3) v2(56.52,79.88) v2(56.52,78.61) v2(56.52,77.34) v2(56.52,76.07) v2(56.52,74.8) v2(56.52,73.53) v2(56.52,72.26) v2(56.52,70.99) v2(56.52,69.72) v2(56.52,68.45) v2(56.52,67.18) v2(56.52,65.91) v2(56.64,90.42) v2(56.64,89.15) v2(56.64,87.88) v2(56.64,86.61) v2(57.28,99.19) v2(57.53,0.76) v2(57.78,72.26) v2(57.78,70.99) v2(57.78,69.72) v2(57.78,68.45) v2(57.78,67.18) v2(57.78,65.91) v2(58.55,99.19) v2(58.8,0.76) v2(59.05,72.26) v2(59.05,70.99) v2(59.05,69.72) v2(59.05,68.45) v2(59.05,67.18) v2(59.05,65.91) v2(59.82,99.19) v2(60.07,0.76) v2(60.33,74.8) v2(60.33,73.53) v2(60.33,72.26) v2(60.33,70.99) v2(60.33,69.72) v2(60.33,68.45) v2(60.33,67.18) v2(60.33,65.91) v2(60.71,76.07) v2(61.09,99.19) v2(61.34,0.76) v2(61.59,81.53) v2(61.59,80.64) v2(61.59,74.8) v2(61.59,73.53) v2(61.59,72.26) v2(61.59,70.99) v2(61.59,69.72) v2(61.59,68.45) v2(61.59,67.18) v2(61.59,65.91) v2(61.98,76.07) v2(62.1,91.82) v2(62.1,90.55) v2(62.1,89.28) v2(62.1,88.01) v2(62.36,99.19) v2(62.61,0.76) v2(62.87,83.19) v2(62.87,80.64) v2(63.25,76.07) v2(63.37,91.82) v2(63.37,90.55) v2(63.37,89.28) v2(63.37,88.01) v2(63.63,99.19) v2(63.88,86.49) v2(63.88,0.76) v2(64.14,83.19) v2(64.14,81.92) v2(64.14,80.64) v2(64.52,76.07) v2(64.64,91.82) v2(64.64,90.55) v2(64.64,89.28) v2(64.64,88.01) v2(64.64,86.49) v2(64.9,99.19) v2(65.15,0.76) v2(65.41,83.19) v2(65.41,81.92) v2(65.41,80.64) v2(65.41,71.75) v2(65.41,70.48) v2(65.41,69.22) v2(65.41,67.94) v2(65.41,66.67) v2(65.41,65.41) v2(65.79,76.07) v2(65.79,74.8) v2(65.91,91.82) v2(65.91,90.55) v2(65.91,89.28) v2(65.91,88.01) v2(66.17,99.19) v2(66.42,0.76) v2(66.67,83.19) v2(66.67,81.92) v2(66.67,80.64) v2(66.67,71.75) v2(66.67,70.48) v2(66.67,69.22) v2(66.67,67.94) v2(66.67,65.41) v2(67.06,76.07) v2(67.06,74.8) v2(67.44,99.19) v2(67.94,83.19) v2(67.94,81.92) v2(67.94,80.64) v2(67.94,71.75) v2(67.94,70.48) v2(67.94,69.22) v2(67.94,67.94) v2(68.2,1.14) v2(68.33,76.07) v2(68.58,98.55) v2(68.96,57.91) v2(68.96,56.64) v2(68.96,55.37) v2(68.96,54.1) v2(68.96,52.83) v2(68.96,51.56) v2(68.96,50.29) v2(68.96,49.02) v2(68.96,47.75) v2(68.96,46.48) v2(68.96,45.21) v2(68.96,43.94) v2(68.96,42.67) v2(68.96,41.4) v2(68.96,40.13) v2(68.96,38.86) v2(68.96,37.59) v2(68.96,36.32) v2(68.96,35.05) v2(68.96,33.78) v2(68.96,32.51) v2(68.96,31.24) v2(68.96,29.97) v2(68.96,28.7) v2(68.96,27.43) v2(68.96,26.16) v2(68.96,24.89) v2(68.96,23.62) v2(68.96,22.35) v2(68.96,21.08) v2(68.96,19.81) v2(68.96,18.54) v2(68.96,17.27) v2(68.96,16) v2(68.96,14.73) v2(68.96,13.46) v2(68.96,12.19) v2(68.96,10.92) v2(68.96,9.65) v2(68.96,8.38) v2(68.96,7.11) v2(68.96,5.84) v2(68.96,4.57) v2(68.96,3.3) v2(68.96,2.03) v2(69.22,97.16) v2(69.22,95.89) v2(69.22,94.61) v2(69.22,93.34) v2(69.22,92.08) v2(69.22,90.81) v2(69.22,89.53) v2(69.22,88.27) v2(69.22,87) v2(69.22,85.72) v2(69.22,84.45) v2(69.22,83.19) v2(69.22,81.92) v2(69.22,80.64) v2(69.22,79.38) v2(69.22,78.11) v2(69.22,76.83) v2(69.22,75.56) v2(69.22,71.75) v2(69.22,70.48) v2(69.22,69.22) v2(69.22,64.9) v2(69.22,63.63) v2(69.22,62.36) v2(69.22,61.09) v2(69.22,59.82)
PVDD: length 4.4
  TOP w0.508: C14.1 v2(57.28,11.05) U2.13 ; v2(56.77,16.76) 57.28,17.27 U2.4
  vias: v1(43.69,14.22) v1(44.55,14.22)
VCC_3V3: length 225.3
  TOP w0.254: 33.43,49.96 33.98,49.96 ; 33.43,49.96 33.43,49.43 ; 33.43,49.96 32.11,48.64 ; 33.43,49.96 33.99,50.53 v2(34.6,50.53) 36.39,52.32 37.09,52.32 37.68,51.73 ; 33.43,49.96 33.71,49.68 ; 43.69,61.64 v2(44.56,62.5) ; v2(49.78,82.93) R15.1 R14.1 ; U1.19 41.71,56.9 v2(41.02,56.9) ; 35.06,68.57 36.77,70.27 36.77,71.44 C35.2 ; 24.16,61.72 24.4,61.48 ; 24.4,61.48 U1.75 ; 24.4,61.48 23.99,61.48 v2(23.88,61.59) ; R16.1 R17.1 R18.1 v2(49.78,76.83) ; U1.11 38.88,54.06 v2(38.88,54.67)
  TOP w0.381: 50.38,57.57 C12.2 49.31,58.7 v2(49.78,59.18) ; 59.05,56.52 R12.1 ; U3.7 20.75,37.77 21.08,38.1 21.08,39.12 21.01,39.04 U3.8 19.72,39.66 20.07,40.01 21.21,40.01 ; v2(16,39.24) 13.26,36.5 U3.3 ; R7.2 v2(9.78,56.77) ; 59.05,53.98 R13.1
  TOP w0.508: 35.06,68.57 34.78,68.28 34.78,66.25 v2(33.3,64.77) ; v1(7.75,44.74) J2.1
  TOP w1.016: 36.45,10.16 39.12,7.49 62.1,7.49 65.79,11.18 65.79,30.35 59.05,37.08 59.05,60.58 61.72,63.25 66.67,63.25 67.69,62.23 67.69,61.72
  BOTTOM w0.381: v2(16,39.24) 21.34,39.24 v2(21.97,39.88)
  BOTTOM w0.508: C9.2 44.06,62.01 v2(44.56,62.5) ; v2(38.88,54.67) 39.78,53.77 C7.2 ; 40.64,56.64 34.42,56.64 33.3,57.76 v2(33.3,64.77) ; C8.2 41.88,56.04 v2(41.02,56.9) ; v2(34.6,50.53) 33.81,49.74 C6.2
  BOTTOM w0.762: 4.83,41.78 3.05,43.56 3.05,50.04 v2(9.78,56.77) ; 4.83,41.78 4.83,41.82 v1(7.75,44.74) 23.88,60.87 v2(23.88,61.59) ; 4.83,41.78 4.83,35.05 6.67,33.21
  vias: v1(6.6,33.02) v1(6.6,32.26) v1(7.87,33.02) v1(7.87,32.26) v1(28.57,32.75) v1(28.57,31.75) v1(29.58,32.75) v1(29.58,31.75) v1(30.58,32.75) v1(30.58,31.75) v1(32.51,47.62) v1(33.51,48.63) v1(33.51,47.62) v1(34.51,48.63) v1(34.51,47.62) v1(35.56,12.83) v1(35.56,11.56) v1(36.2,12.19) v1(36.83,12.83) v1(36.83,11.56) v1(37.47,26.16) v1(37.47,25.27) v1(37.47,24.38) v1(38.48,26.16) v1(38.48,25.27) v1(38.48,24.38) v1(39.5,26.16) v1(39.5,25.27) v1(39.5,24.38) v1(42.93,88.01) v1(42.93,87.12) v1(42.93,86.26)
VCC_5V: length 104.2
  TOP w0.508: v2(55.95,63.75) 57.4,62.3 57.4,47.37 56.01,45.97 56.01,34.04 55.24,33.27 v2(55.24,26.8) 55.24,24 56.01,23.24 LB2.2 ; LCD1.28 48.64,93.98 48.64,90.93 48.13,90.42 C30.2 48.17,88.9 52.58,84.49 v2(52.58,82.8)
  BOTTOM w0.508: v2(55.95,63.75) 52.58,67.12 v2(52.58,82.8)
  BOTTOM w0.762: v1(40.89,11.3) 41.53,11.94 41.53,19.94 48.39,26.8 v2(55.24,26.8)
  vias: v1(19.18,14.73) v1(19.18,13.97) v1(39.62,11.3)
BOOT0: length 2.4
  TOP w0.152: 29.65,50.35 29.65,50.43 U1.94
DAC2: length 49
  TOP w0.152: 42.98,62.34 43.98,63.34
  TOP w0.381: 43.98,63.34 44.52,63.88 52.32,63.88 53.85,62.36 53.85,46.48 53.47,46.1 C18.1
DCMI_D0: length 88.2
  TOP w0.152: v1(33.66,36.32) 18.86,51.12 18.86,65.6 20.07,66.8 25.27,66.8 25.84,66.23 28.13,66.23 U1.63
  BOTTOM w0.152: v1(33.66,36.32) 36.58,39.24 43.81,39.24 44.41,39.84 44.63,39.84 45.24,39.23 45.45,39.23 45.67,39.45 45.67,39.66 45.06,40.27 45.06,40.49 45.28,40.7 45.49,40.7 46.1,40.09 46.31,40.09 46.53,40.31 46.53,40.52 45.92,41.14 45.92,41.35 50.55,45.97 52.96,45.97 56.9,49.91 62.1,49.91 63.63,51.44 J3.8
DCMI_D1: length 84
  TOP w0.152: v1(35.69,35.31) 35.56,35.31 19.6,51.27 19.6,64.99 20.8,66.19 24.74,66.19 25.31,65.62 28.03,65.62 28.83,64.82
  BOTTOM w0.152: 67.31,48.9 66.04,47.62 58.29,47.62 47.62,36.96 37.34,36.96 v1(35.69,35.31)
DCMI_D2: length 81.4
  TOP w0.152: U1.97 30.61,49.26 30.61,45.09 30.84,44.86 31.05,44.86 31.92,45.72 32.13,45.72 32.35,45.5 32.35,45.29 31.48,44.42 31.48,44.21 31.7,43.99 31.91,43.99 32.78,44.86 32.99,44.86 33.21,44.64 33.21,44.43 32.34,43.56 32.34,43.35 32.56,43.13 32.78,43.13 33.64,44 33.86,44 34.07,43.78 34.07,43.56 33.21,42.7 33.21,42.48 33.43,42.27 33.64,42.27 34.51,43.13 34.72,43.13 34.94,42.91 34.94,42.7 34.07,41.83 34.07,41.62 37.34,38.35 v1(37.34,37.59)
  BOTTOM w0.152: v1(37.34,37.59) 45.97,37.59 46.35,37.97 46.56,37.97 47.05,37.48 47.26,37.48 47.48,37.7 47.48,37.91 47,38.4 47,38.61 47.21,38.83 47.43,38.83 47.91,38.35 48.13,38.35 48.34,38.56 48.34,38.78 47.86,39.26 47.86,39.48 48.26,39.88 48.26,40.26 47.88,40.64 47.88,41.02 48.12,41.26 48.33,41.26 49.58,40.02 49.79,40.02 50.01,40.23 50.01,40.45 48.77,41.69 48.77,41.91 48.98,42.13 49.2,42.13 50.44,40.88 50.66,40.88 50.88,41.1 50.88,41.31 49.63,42.56 49.63,42.77 49.85,42.99 50.06,42.99 51.31,41.74 51.52,41.74 51.74,41.96 51.74,42.17 50.49,43.42 50.49,43.63 50.71,43.85 50.92,43.85 52.17,42.61 52.38,42.61 52.6,42.82 52.6,43.04 51.36,44.28 51.36,44.5 51.56,44.7 52.8,44.7 52.95,44.55 52.95,43.71 53.1,43.56 53.41,43.56 53.56,43.71 53.56,44.55 53.71,44.7 54.1,44.7 57.78,48.39 62.99,48.39 63.5,48.9 64.77,48.9
DCMI_D3: length 81.1
  TOP w0.152: 32.72,50.67 31.24,49.19 31.24,47.24 32.72,45.77 32.93,45.77 33.54,46.38 33.75,46.38 33.97,46.16 33.97,45.95 33.36,45.34 33.36,45.13 33.75,44.73 33.96,44.73 34.89,45.66 35.11,45.66 35.32,45.44 35.32,45.23 34.4,44.3 34.4,44.09 34.62,43.87 34.83,43.87 35.76,44.8 35.97,44.8 36.19,44.58 36.19,44.37 35.26,43.44 35.26,43.23 35.81,42.67 35.81,42.21 35.2,41.6 35.2,41.38 35.42,41.16 35.63,41.16 35.87,41.4 36.2,41.4 36.63,40.97 36.63,40.75 36.33,40.46 36.33,40.25 36.55,40.03 36.77,40.03 37.06,40.32 37.27,40.32 38.23,39.37 38.23,36.07 v1(39.12,35.18)
  BOTTOM w0.152: v1(39.12,35.18) 49.4,35.18 52.13,37.91 52.75,37.91 52.9,38.06 52.9,39.09 53.06,39.24 53.36,39.24 53.51,39.09 53.51,38.06 53.67,37.91 54.55,37.91 55.09,38.46 55.09,38.67 54.67,39.09 54.67,39.3 54.89,39.52 55.1,39.52 55.52,39.1 55.74,39.1 55.96,39.32 55.96,39.53 55.53,39.95 55.53,40.17 55.75,40.39 55.97,40.39 56.39,39.96 56.6,39.96 56.82,40.18 56.82,40.4 56.4,40.82 56.4,41.03 56.62,41.25 56.83,41.25 57.25,40.83 57.46,40.83 57.68,41.05 57.68,41.26 57.26,41.68 57.26,41.89 57.48,42.11 57.69,42.11 58.12,41.69 58.33,41.69 58.55,41.91 58.55,42.12 58.13,42.55 58.13,42.76 58.34,42.98 58.56,42.98 58.98,42.56 59.19,42.56 59.41,42.77 59.41,42.99 59.18,43.22 59.18,45.57 59.33,45.72 59.84,45.72 59.99,45.57 59.99,44.48 60.15,44.32 60.45,44.32 60.6,44.48 60.6,45.57 60.76,45.72 61.06,45.72 61.21,45.57 61.21,44.48 61.37,44.32 61.67,44.32 61.82,44.48 61.82,45.57 61.98,45.72 62.28,45.72 62.43,45.57 62.43,44.73 62.59,44.58 62.89,44.58 63.04,44.73 63.04,45.57 63.2,45.72 63.75,45.72 64.39,45.09 66.04,45.09 J3.11
DCMI_D4: length 81.2
  TOP w0.152: 36.62,50.67 39.12,48.17 v1(39.12,36.2)
  BOTTOM w0.152: J3.12 63.75,46.35 63.6,46.51 63.6,46.84 63.44,46.99 63.14,46.99 62.99,46.84 62.99,46.51 62.83,46.35 62.53,46.35 62.38,46.51 62.38,46.84 62.22,46.99 61.92,46.99 61.77,46.84 61.77,46.51 61.62,46.35 61.31,46.35 61.16,46.51 61.16,46.84 61.01,46.99 60.7,46.99 60.55,46.84 60.55,46.51 60.4,46.35 60.09,46.35 59.94,46.51 59.94,46.84 59.79,46.99 59.48,46.99 59.33,46.84 59.33,46.51 59.18,46.35 57.91,46.35 57.36,45.81 57.36,45.59 58.61,44.35 58.61,44.13 58.39,43.91 58.18,43.91 56.93,45.16 56.72,45.16 56.5,44.94 56.5,44.73 57.75,43.48 57.75,43.27 57.53,43.05 57.32,43.05 56.07,44.3 55.85,44.3 55.64,44.08 55.64,43.87 56.88,42.62 56.88,42.41 56.66,42.19 56.45,42.19 55.2,43.43 54.99,43.43 54.77,43.22 54.77,43 56.02,41.76 56.02,41.54 55.8,41.32 55.59,41.32 54.34,42.57 54.13,42.57 53.91,42.35 53.91,42.14 55.16,40.89 55.16,40.68 54.94,40.46 54.72,40.46 53.48,41.71 53.26,41.71 53.05,41.49 53.05,41.27 54.29,40.03 54.29,39.81 54.07,39.6 53.86,39.6 52.61,40.84 52.4,40.84 51.48,39.92 51.48,39.71 52.15,39.03 52.15,38.82 51.93,38.6 51.72,38.6 51.04,39.27 50.83,39.27 50.61,39.06 50.61,38.84 51.29,38.17 51.29,37.95 51.07,37.73 50.86,37.73 50.18,38.41 49.97,38.41 49.75,38.19 49.75,37.98 50.42,37.3 50.42,37.09 50.21,36.87 49.99,36.87 49.32,37.55 49.1,37.55 48.88,37.33 48.88,37.11 49.56,36.44 49.56,36.23 49.34,36.01 49.13,36.01 48.45,36.68 48.24,36.68 47.75,36.2 44.77,36.2 44.52,35.94 44.16,35.94 43.91,36.2 43.55,36.2 43.3,35.94 42.94,35.94 42.69,36.2 42.33,36.2 42.08,35.94 41.72,35.94 41.47,36.2 41.11,36.2 40.86,35.94 40.51,35.94 40.25,36.2 v1(39.12,36.2)
DCMI_D5: length 81.2
  TOP w0.152: v1(39.12,33.15) 37.47,33.15 36.2,34.42 36.2,36.7 25.91,46.99 25.91,50.04 27.81,51.94 29.75,51.94 U1.92
  BOTTOM w0.152: v1(39.12,33.15) 51.82,33.15 52.16,33.49 52.38,33.49 53.05,32.82 53.27,32.82 53.48,33.04 53.48,33.25 52.81,33.93 52.81,34.14 53.03,34.36 53.24,34.36 53.92,33.68 54.13,33.68 54.35,33.9 54.35,34.11 53.67,34.79 53.67,35 55.24,36.58 56.39,36.58 56.83,37.02 57.04,37.02 57.72,36.34 57.93,36.34 58.15,36.56 58.15,36.77 57.47,37.45 57.47,37.66 57.69,37.88 57.9,37.88 58.58,37.2 58.79,37.2 59.01,37.42 59.01,37.64 58.34,38.31 58.34,38.52 58.55,38.74 58.77,38.74 59.44,38.07 59.66,38.07 59.88,38.29 59.88,38.5 59.2,39.17 59.2,39.39 59.42,39.61 59.63,39.61 60.31,38.93 60.52,38.93 60.74,39.15 60.74,39.36 60.06,40.04 60.06,40.25 60.45,40.64 60.45,42.04 60.71,42.29 60.99,42.29 61.14,42.14 61.14,40.28 61.29,40.13 61.59,40.13 61.75,40.28 61.75,42.14 61.9,42.29 62.2,42.29 62.36,42.14 62.36,41.43 62.51,41.27 62.81,41.27 62.97,41.43 62.97,42.14 63.12,42.29 63.88,42.29 64.14,42.55 66.04,42.55 J3.13
DCMI_D6: length 81.1
  TOP w0.152: 31.66,51.73 30.95,51.02 30.95,51.02 30.73,50.8 30.73,50.29 29.84,49.4 29.84,48.41 29.69,48.26 28.73,48.26 28.57,48.11 28.57,47.8 28.73,47.65 29.69,47.65 29.84,47.5 29.84,47.19 29.69,47.04 28.73,47.04 28.57,46.89 28.57,46.58 28.73,46.43 29.69,46.43 29.84,46.28 29.84,44.83 34.72,39.95 34.72,39.74 34.49,39.51 34.49,39.3 34.71,39.08 34.92,39.08 35.15,39.31 35.37,39.31 35.59,39.09 35.59,38.88 35.35,38.65 35.35,38.44 35.57,38.22 35.79,38.22 35.89,38.32 36.1,38.32 36.83,37.59 36.83,37.08 36.98,36.93 37.44,36.93 37.59,36.78 37.59,36.47 37.44,36.32 36.98,36.32 36.83,36.17 36.83,35.86 36.98,35.71 37.44,35.71 37.59,35.56 37.59,35.26 37.44,35.1 36.98,35.1 36.83,34.95 36.83,34.67 37.34,34.16 v1(39.12,34.16)
  BOTTOM w0.152: v1(39.12,34.16) 49.4,34.16 49.75,34.51 49.97,34.51 50.77,33.71 50.98,33.71 51.2,33.93 51.2,34.14 50.4,34.95 50.4,35.16 50.62,35.38 50.83,35.38 51.63,34.57 51.85,34.57 52.06,34.79 52.06,35.01 51.26,35.81 51.26,36.02 51.48,36.24 51.69,36.24 52.5,35.44 52.71,35.44 52.93,35.66 52.93,35.87 52.13,36.67 52.13,36.89 52.45,37.21 53.31,37.21 53.46,37.06 53.46,36.35 53.61,36.2 53.92,36.2 54.07,36.35 54.07,37.06 54.22,37.21 54.74,37.21 55.27,37.74 55.48,37.74 55.96,37.25 56.18,37.25 56.4,37.47 56.4,37.69 55.91,38.17 55.91,38.38 56.13,38.6 56.34,38.6 56.83,38.12 57.04,38.12 57.26,38.34 57.26,38.55 56.77,39.03 56.77,39.25 56.99,39.47 57.21,39.47 57.69,38.98 57.9,38.98 58.12,39.2 58.12,39.41 57.64,39.9 57.64,40.11 57.86,40.33 58.07,40.33 58.55,39.84 58.77,39.84 58.99,40.06 58.99,40.28 58.5,40.76 58.5,40.98 58.72,41.19 58.93,41.19 59.42,40.71 59.63,40.71 59.85,40.93 59.85,41.14 59.36,41.63 59.36,41.84 60.3,42.77 60.3,42.99 60.05,43.24 60.05,43.45 60.26,43.67 60.48,43.67 61.05,43.1 61.26,43.1 61.98,43.81 62.38,43.81 62.53,43.66 62.53,43.08 62.69,42.93 62.99,42.93 63.14,43.08 63.14,43.66 63.3,43.81 J3.14
DCMI_D7: length 81.8
  TOP w0.152: 37.33,51.38 40.64,48.06 40.64,38.81 40.79,38.66 42.27,38.66 42.42,38.51 42.42,38.2 42.27,38.05 40.79,38.05 40.64,37.9 40.64,37.59 40.79,37.44 42.27,37.44 42.42,37.29 42.42,36.98 42.27,36.83 40.79,36.83 40.64,36.68 40.64,36.38 40.79,36.22 42.27,36.22 42.42,36.07 42.42,35.77 42.27,35.61 40.79,35.61 40.64,35.46 40.64,35.16 40.79,35 42.27,35 42.42,34.85 42.42,34.55 42.27,34.39 40.79,34.39 40.64,34.24 40.64,33.94 40.79,33.78 42.27,33.78 42.42,33.63 42.42,33.33 42.27,33.17 40.79,33.17 40.64,33.02 v1(40.64,32.26)
  BOTTOM w0.152: J3.15 67.31,41.15 66.04,39.88 63.63,39.88 62.56,38.81 62.56,38.6 63.05,38.12 63.05,37.9 62.83,37.68 62.62,37.68 62.13,38.17 61.92,38.17 61.7,37.95 61.7,37.74 62.18,37.25 62.18,37.04 61.97,36.82 61.75,36.82 61.27,37.3 61.05,37.3 60.84,37.09 60.84,36.87 61.32,36.39 61.32,36.17 61.1,35.96 60.89,35.96 60.4,36.44 60.19,36.44 59.97,36.22 59.97,36.01 60.46,35.52 60.46,35.31 60.24,35.09 60.03,35.09 59.54,35.58 59.33,35.58 58.8,35.05 58.35,35.05 58.2,34.9 58.2,33.93 58.04,33.78 57.74,33.78 57.59,33.93 57.59,34.9 57.43,35.05 56.39,35.05 55.86,34.52 55.86,34.31 56.85,33.32 56.85,33.1 56.63,32.89 56.42,32.89 55.43,33.88 55.21,33.88 55,33.66 55,33.45 55.99,32.45 55.99,32.24 55.77,32.02 55.56,32.02 54.56,33.01 54.35,33.01 53.59,32.26 v1(40.64,32.26)
DCMI_HSYNC: length 81.6
  TOP w0.152: 43.34,61.99 44.59,63.25 45.13,63.25 45.28,63.09 45.28,62.51 45.43,62.36 45.74,62.36 45.89,62.51 45.89,63.09 46.04,63.25 46.62,63.25 46.77,63.09 46.77,61.85 46.62,61.7 46,61.7 45.85,61.54 45.85,61.24 46,61.09 46.62,61.09 46.77,60.93 46.77,60.6 46.93,60.45 47.23,60.45 47.38,60.6 47.38,63.09 47.54,63.25 47.84,63.25 47.99,63.09 47.99,61.24 48.15,61.09 48.45,61.09 48.6,61.24 48.6,63.09 48.76,63.25 49.06,63.25 49.21,63.09 49.21,60.99 49.36,60.83 49.67,60.83 49.82,60.99 49.82,63.09 49.97,63.25 50.28,63.25 50.43,63.09 50.43,62.51 50.58,62.36 50.89,62.36 51.04,62.51 51.04,63.09 51.19,63.25 51.69,63.25 52.32,62.61 52.32,61.66 52.17,61.5 51.21,61.5 51.05,61.35 51.05,61.05 51.21,60.89 52.17,60.89 52.32,60.74 52.32,60.44 52.17,60.28 51.21,60.28 51.05,60.13 51.05,59.83 51.21,59.67 52.17,59.67 52.32,59.52 52.32,59.22 52.17,59.07 51.21,59.07 51.05,58.91 51.05,58.61 51.21,58.46 52.17,58.46 52.83,57.8 52.83,46.99 v1(52.32,46.48)
  BOTTOM w0.152: v1(52.32,46.48) 51.44,47.37 51.44,48.39 51.7,48.65 51.91,48.65 53.22,47.34 53.44,47.34 53.65,47.56 53.65,47.77 52.34,49.08 52.34,49.3 52.56,49.51 52.78,49.51 54.09,48.2 54.3,48.2 54.52,48.42 54.52,48.64 53.21,49.95 53.21,50.16 53.72,50.67 54.31,50.67 54.46,50.52 54.46,50.06 54.61,49.91 54.92,49.91 55.07,50.06 55.07,50.52 55.22,50.67 55.53,50.67 55.68,50.52 55.68,50.06 55.83,49.91 56.14,49.91 56.29,50.06 56.29,50.52 56.44,50.67 61.59,50.67 63.63,52.7 66.04,52.7 J3.5
DCMI_PIXCLK: length 83.6
  TOP w0.152: v1(54.61,34.8) 54.61,47.29 54.76,47.44 55.85,47.44 56.01,47.59 56.01,47.9 55.85,48.05 54.76,48.05 54.61,48.2 54.61,48.51 54.76,48.66 55.85,48.66 56.01,48.81 56.01,49.12 55.85,49.27 54.76,49.27 54.61,49.42 54.61,49.73 54.76,49.88 55.85,49.88 56.01,50.03 56.01,50.34 55.85,50.49 54.76,50.49 54.61,50.64 54.61,50.94 54.76,51.1 55.85,51.1 56.01,51.25 56.01,51.55 55.85,51.71 54.76,51.71 54.61,51.86 54.61,52.16 54.76,52.32 55.85,52.32 56.01,52.47 56.01,52.77 55.85,52.93 54.76,52.93 54.61,53.08 54.61,53.38 54.76,53.54 55.85,53.54 56.01,53.69 56.01,53.99 55.85,54.15 54.76,54.15 54.61,54.3 54.61,54.6 54.76,54.75 55.85,54.75 56.01,54.91 56.01,55.21 55.85,55.36 54.76,55.36 54.61,55.52 54.61,55.82 54.76,55.97 55.85,55.97 56.01,56.13 56.01,56.43 55.85,56.58 54.76,56.58 54.61,56.74 54.61,57.04 54.76,57.19 55.85,57.19 56.01,57.35 56.01,57.65 55.85,57.8 54.76,57.8 54.61,57.96 54.61,58.26 54.76,58.41 55.85,58.41 56.01,58.56 56.01,58.87 55.85,59.02 54.76,59.02 54.61,59.17 54.61,59.48 54.76,59.63 55.85,59.63 56.01,59.78 56.01,60.09 55.85,60.24 54.76,60.24 54.61,60.39 54.61,60.7 54.76,60.85 55.85,60.85 56.01,61 56.01,61.31 55.85,61.46 54.76,61.46 54.61,61.61 54.61,62.87 52.96,64.52 44.45,64.52 42.63,62.7
  BOTTOM w0.152: v1(54.61,34.8) 55.5,35.69 58.17,35.69 63.75,41.27 J3.16
DCMI_VSYNC: length 81.3
  TOP w0.152: 30.95,52.44 29.82,51.31 28.07,51.31 26.67,49.91 26.67,47.12 v1(33.91,39.88)
  BOTTOM w0.152: v1(33.91,39.88) 37.34,39.88 38.1,40.64 41.15,40.64 41.71,41.21 41.93,41.21 42.73,40.4 42.94,40.4 43.16,40.62 43.16,40.84 42.36,41.64 42.36,41.85 42.58,42.07 42.79,42.07 43.59,41.27 43.81,41.27 44.03,41.49 44.03,41.7 43.22,42.5 43.22,42.72 43.44,42.93 43.65,42.93 44.46,42.13 44.67,42.13 44.89,42.35 44.89,42.56 44.09,43.37 44.09,43.58 44.31,43.8 44.52,43.8 45.32,42.99 45.53,42.99 45.75,43.21 45.75,43.43 44.95,44.23 44.95,44.44 45.17,44.66 45.38,44.66 46.18,43.86 46.4,43.86 46.62,44.08 46.62,44.29 45.81,45.09 45.81,45.31 46.03,45.52 46.25,45.52 47.05,44.72 47.26,44.72 47.48,44.94 47.48,45.15 46.68,45.96 46.68,46.17 46.9,46.39 47.11,46.39 47.91,45.59 48.13,45.59 48.34,45.8 48.34,46.02 47.54,46.82 47.54,47.03 47.76,47.25 47.97,47.25 48.78,46.45 48.99,46.45 49.21,46.67 49.21,46.88 48.4,47.68 48.4,47.9 48.62,48.12 48.84,48.12 49.64,47.31 49.85,47.31 50.07,47.53 50.07,47.74 49.27,48.55 49.27,48.76 52.9,52.39 61.15,52.39 64.01,55.24 66.04,55.24 J3.3
FLASH_CS: length 26.3
  TOP w0.152: U3.1 13.13,39.04 14.99,40.89 v1(14.99,43.31) ; 25.3,58.09 24.51,57.31 v1(24.51,55.24)
  BOTTOM w0.152: v1(24.51,55.24) 25.15,54.61 25.15,53.47 v1(14.99,43.31)
FSMC_D0: length 34.2
  TOP w0.152: U1.61 25.04,70.74 24.13,70.74 23.5,71.37 23.5,88.01 20.7,90.81 20.7,93.98 LCD1.6
FSMC_D1: length 31.5
  TOP w0.152: v1(22.73,87) 22.73,71.12 23.88,69.98 25.09,69.98 29.54,65.53
  BOTTOM w0.152: LCD1.7 22.73,90.93 v1(22.73,87)
FSMC_D2: length 60.7
  TOP w0.152: 26.71,56.68 26.04,56 26.04,55.63 v1(26.42,55.24)
  BOTTOM w0.152: v1(26.42,55.24) 28.32,55.24 29.84,56.77 29.84,67.44 26.48,70.8 26.48,73.09 15.49,84.08 15.49,95.5 16.64,96.65 23.11,96.65 LCD1.8
FSMC_D3: length 63.9
  TOP w0.152: v1(28.96,57.28) 28.02,57.28 U1.82
  BOTTOM w0.152: LCD1.9 25.91,93.85 25.91,95.76 24.13,97.54 16.13,97.54 14.1,95.5 14.1,84.45 25.72,72.83 25.72,70.38 29.3,66.8 29.3,57.62 v1(28.96,57.28)
FSMC_D4: length 46
  TOP w0.152: LCD1.10 28.26,96.46 30.29,96.46 30.99,95.76 30.99,89.41 33.15,87.25 38.23,87.25 44.83,80.64 44.83,69.85 U1.38
FSMC_D5: length 38.4
  TOP w0.152: 39.8,65.53 44.33,70.06 44.33,79.87 37.84,86.37 32.38,86.37 29.59,89.15 LCD1.11
FSMC_D6: length 41.6
  TOP w0.152: LCD1.12 28.32,93.98 28.32,88.77 31.22,85.87 37.07,85.87 43.83,79.11 43.83,70.27 U1.40
FSMC_D7: length 35.4
  TOP w0.152: 39.09,66.24 43.33,70.47 43.33,78.46 36.45,85.34 v1(32.13,85.34)
  BOTTOM w0.152: v1(32.13,85.34) LCD1.13
FSMC_D8: length 38.5
  TOP w0.152: U1.42 41.64,69.48 41.64,69.48 42.84,70.68 42.84,77.78 36.04,84.58 v1(31.5,84.58)
  BOTTOM w0.152: v1(31.5,84.58) 30.86,85.22 30.86,93.98 LCD1.14
FSMC_D9: length 31.2
  TOP w0.152: 38.39,66.94 41.43,69.98 41.43,69.98 42.34,70.89 42.34,77.19 35.71,83.82 v1(34.67,83.82)
  BOTTOM w0.152: v1(34.67,83.82) LCD1.15
FSMC_D10: length 34
  TOP w0.152: U1.44 41.22,70.48 41.22,70.48 41.84,71.1 41.84,76.65 35.69,82.8 v1(34.8,82.8)
  BOTTOM w0.152: v1(34.8,82.8) 33.53,84.07 33.53,94.11 LCD1.16
FSMC_D11: length 29.4
  TOP w0.152: v1(35.81,81.79) 41.34,76.26 41.34,71.31 41.02,70.98 41.01,70.98 37.68,67.65
  BOTTOM w0.152: LCD1.17 37.21,83.19 v1(35.81,81.79)
FSMC_D12: length 32.2
  TOP w0.152: 37.33,68 40.81,71.48 40.81,71.48 40.84,71.51 40.84,75.75 v1(34.8,81.79)
  BOTTOM w0.152: LCD1.18 36.07,94.11 36.07,83.06 v1(34.8,81.79)
FSMC_D13: length 35.9
  TOP w0.152: v1(30.48,78.36) 29.72,77.6 27.81,77.6 26.42,76.2 26.42,73.6 32.02,68
  BOTTOM w0.152: v1(30.48,78.36) 34.29,78.36 39.75,83.82 LCD1.19
FSMC_D14: length 39.2
  TOP w0.152: v1(29.72,78.99) 28.96,78.23 27.3,78.23 25.78,76.71 25.78,73.53 31.66,67.65
  BOTTOM w0.152: v1(29.72,78.99) 33.78,78.99 38.61,83.82 38.61,94.11 LCD1.20
FSMC_D15: length 41.4
  TOP w0.152: U1.57 25.15,73.46 25.15,76.96 27.18,78.99 v1(28.7,78.99)
  BOTTOM w0.152: LCD1.21 40.77,91.19 40.77,83.57 34.92,77.72 29.97,77.72 v1(28.7,78.99)
JTCK: length 38.6
  TOP w0.152: U1.76 24,57.51 24,54.86 v1(24.51,54.36) ; v1(9.78,30.61) 8.08,28.91 J1.3
  BOTTOM w0.152: v1(24.51,54.36) 24.51,53.85 10.12,39.46 10.12,30.95 v1(9.78,30.61)
JTMS: length 42.2
  TOP w0.152: v1(27.5,59.25) 26.92,59.82 26.92,61.07 26,61.99 ; v1(8.64,30.61) 8.19,30.16 J1.2
  BOTTOM w0.152: v1(8.64,30.61) 9.4,31.37 9.4,39.62 23.62,53.85 23.62,55.37 v1(27.5,59.25)
KEY1: length 73.6
  TOP w0.152: v1(32.13,55.12) 32.89,55.12 39.75,61.98 40.49,61.98 U1.33 ; SW2.1 SW2.2 6.73,79.88 9.78,76.83 9.78,72.77 11.18,71.37 18.8,71.37 21.08,69.09 25.15,69.09 v1(27.18,67.06)
  BOTTOM w0.152: v1(27.18,67.06) 28.07,67.06 28.83,66.29 28.83,58.67 25.91,55.75 25.91,54.99 26.42,54.48 31.5,54.48 v1(32.13,55.12)
KEY3: length 64
  TOP w0.152: v1(9.27,20.45) 6.73,17.91 SW3.1 SW3.2 ; U1.7 v1(37.19,52.93)
  BOTTOM w0.152: v1(37.19,52.93) 28.55,52.93 17.4,41.78 13.72,41.78 10.92,38.99 10.92,30.86 9.27,29.21 v1(9.27,20.45)
LCD_CS: length 45.8
  TOP w0.152: U1.88 30.1,55.12 v1(31.11,55.12)
  BOTTOM w0.152: LCD1.1 16.89,83.82 27.3,73.41 27.3,71.12 30.48,67.94 30.48,55.75 v1(31.11,55.12)
LCD_RD: length 48.3
  TOP w0.152: U1.85 28.86,56.01 30.73,56.01 v1(31.11,56.39)
  BOTTOM w0.152: v1(31.11,56.39) 31.11,68.45 28.19,71.37 28.19,73.66 18.03,83.82 18.03,93.85 19.43,95.25
LCD_RS: length 39.8
  TOP w0.152: 30.95,66.94 24.26,73.64 24.26,88.9 23.24,89.92 23.24,96.01 22.23,97.03 18.67,97.03 LCD1.2
LCD_WR: length 45.8
  TOP w0.152: 28.48,54.91 29.19,55.63 31.37,55.63 v1(32.13,56.39)
  BOTTOM w0.152: v1(32.13,56.39) 31.75,56.77 31.75,68.83 29.02,71.56 29.02,73.98 19.43,83.57 19.43,92.71
LED1: length 35.4
  TOP w0.152: v1(25.02,68.45) 20.7,68.45 18.67,70.48 10.54,70.48 8.93,72.1 R4.2 ; U1.59 29.89,67.29 29.86,67.29 v1(24.13,73.03)
  BOTTOM w0.152: v1(25.02,68.45) 25.02,72.14 v1(24.13,73.03)
LED2: length 28
  TOP w0.152: R5.2 18.41,69.47 19.94,67.94 v1(24.13,67.94) ; v1(24.13,71.75) 24.64,71.25 25.24,71.25 30.25,66.24
  BOTTOM w0.152: v1(24.13,71.75) v1(24.13,67.94)
LED3: length 60.2
  TOP w0.152: v1(32.13,53.98) 32.64,54.48 33.27,54.48 39.88,61.09 41.05,61.09 44.04,58.09 ; v1(26.16,67.06) 25.78,67.44 19.18,67.44 18.29,68.33 10.29,68.33 8.93,66.97 R6.2
  BOTTOM w0.152: v1(32.13,53.98) 26.29,53.98 25.4,54.86 25.4,56.13 28.32,59.05 28.32,65.79 27.75,66.36 26.86,66.36 v1(26.16,67.06)
MUTE: length 110.3
  TOP w0.152: v1(13.72,20.45) 47.88,20.45 51.69,16.64 55.24,16.64 56.01,17.4 U2.5 ; 26.36,62.34 23.05,65.66 21.21,65.66 20.19,64.64 20.19,51.69 v1(24.26,47.62)
  BOTTOM w0.152: v1(13.72,20.45) 11.05,20.45 10.16,21.34 10.16,29.08 11.56,30.48 11.56,38.86 13.84,41.15 17.78,41.15 v1(24.26,47.62)
